# Allegro board XME0724CB_R21_4C.brd
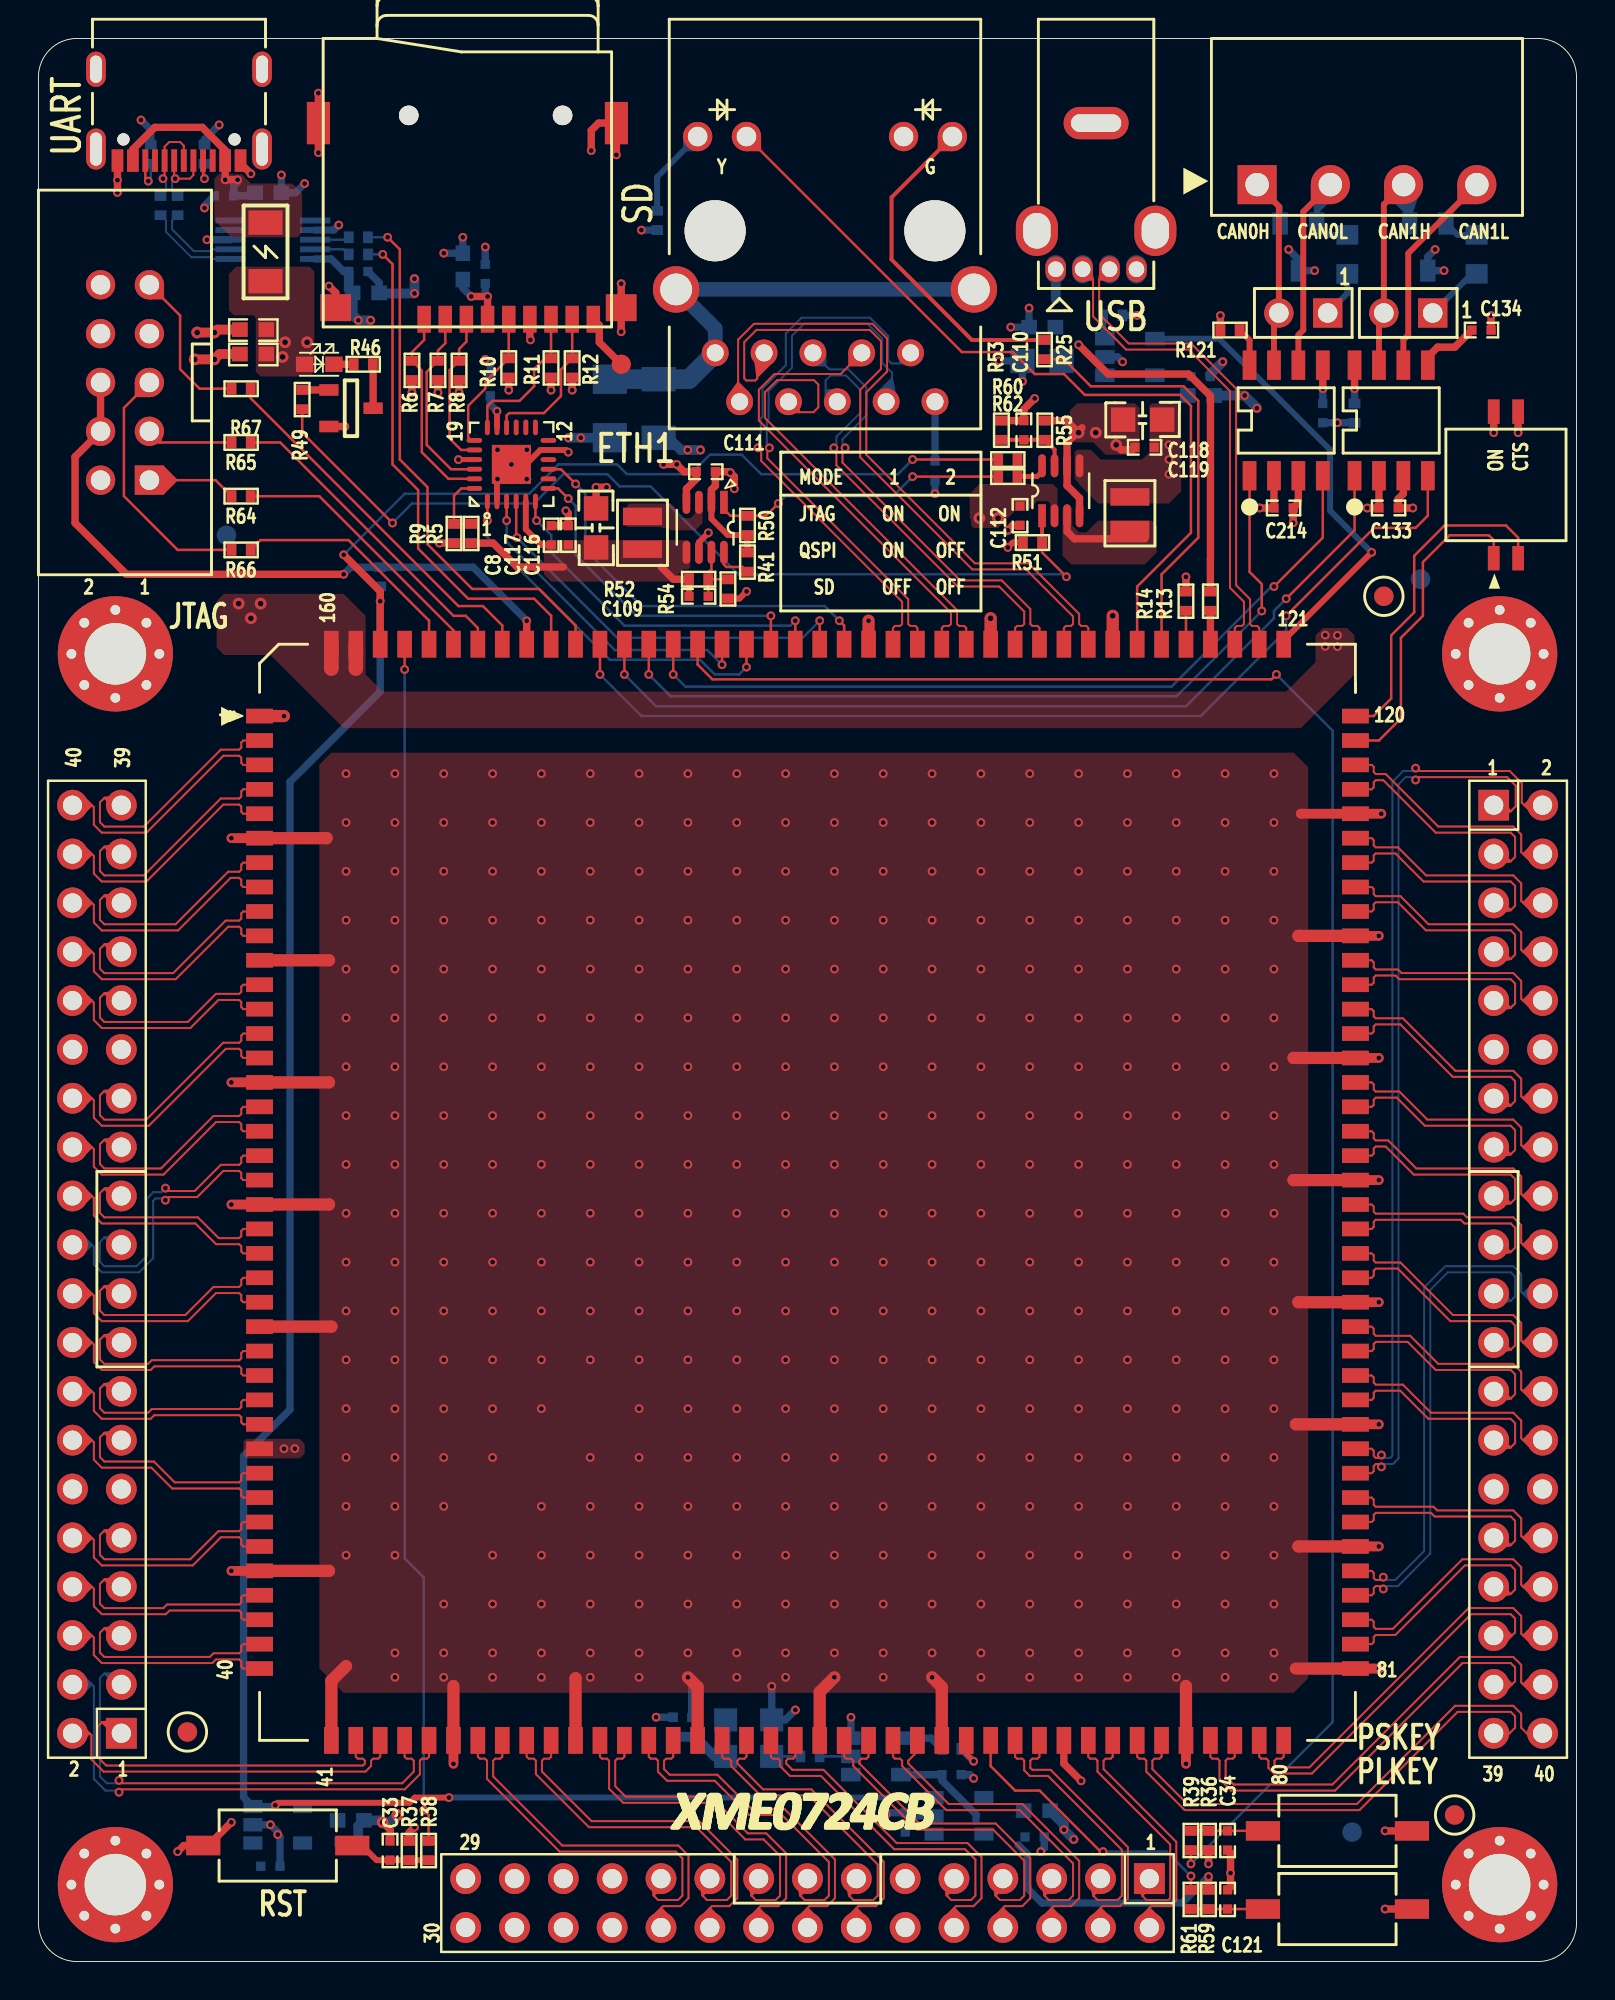
[diagram p0: board, top side]
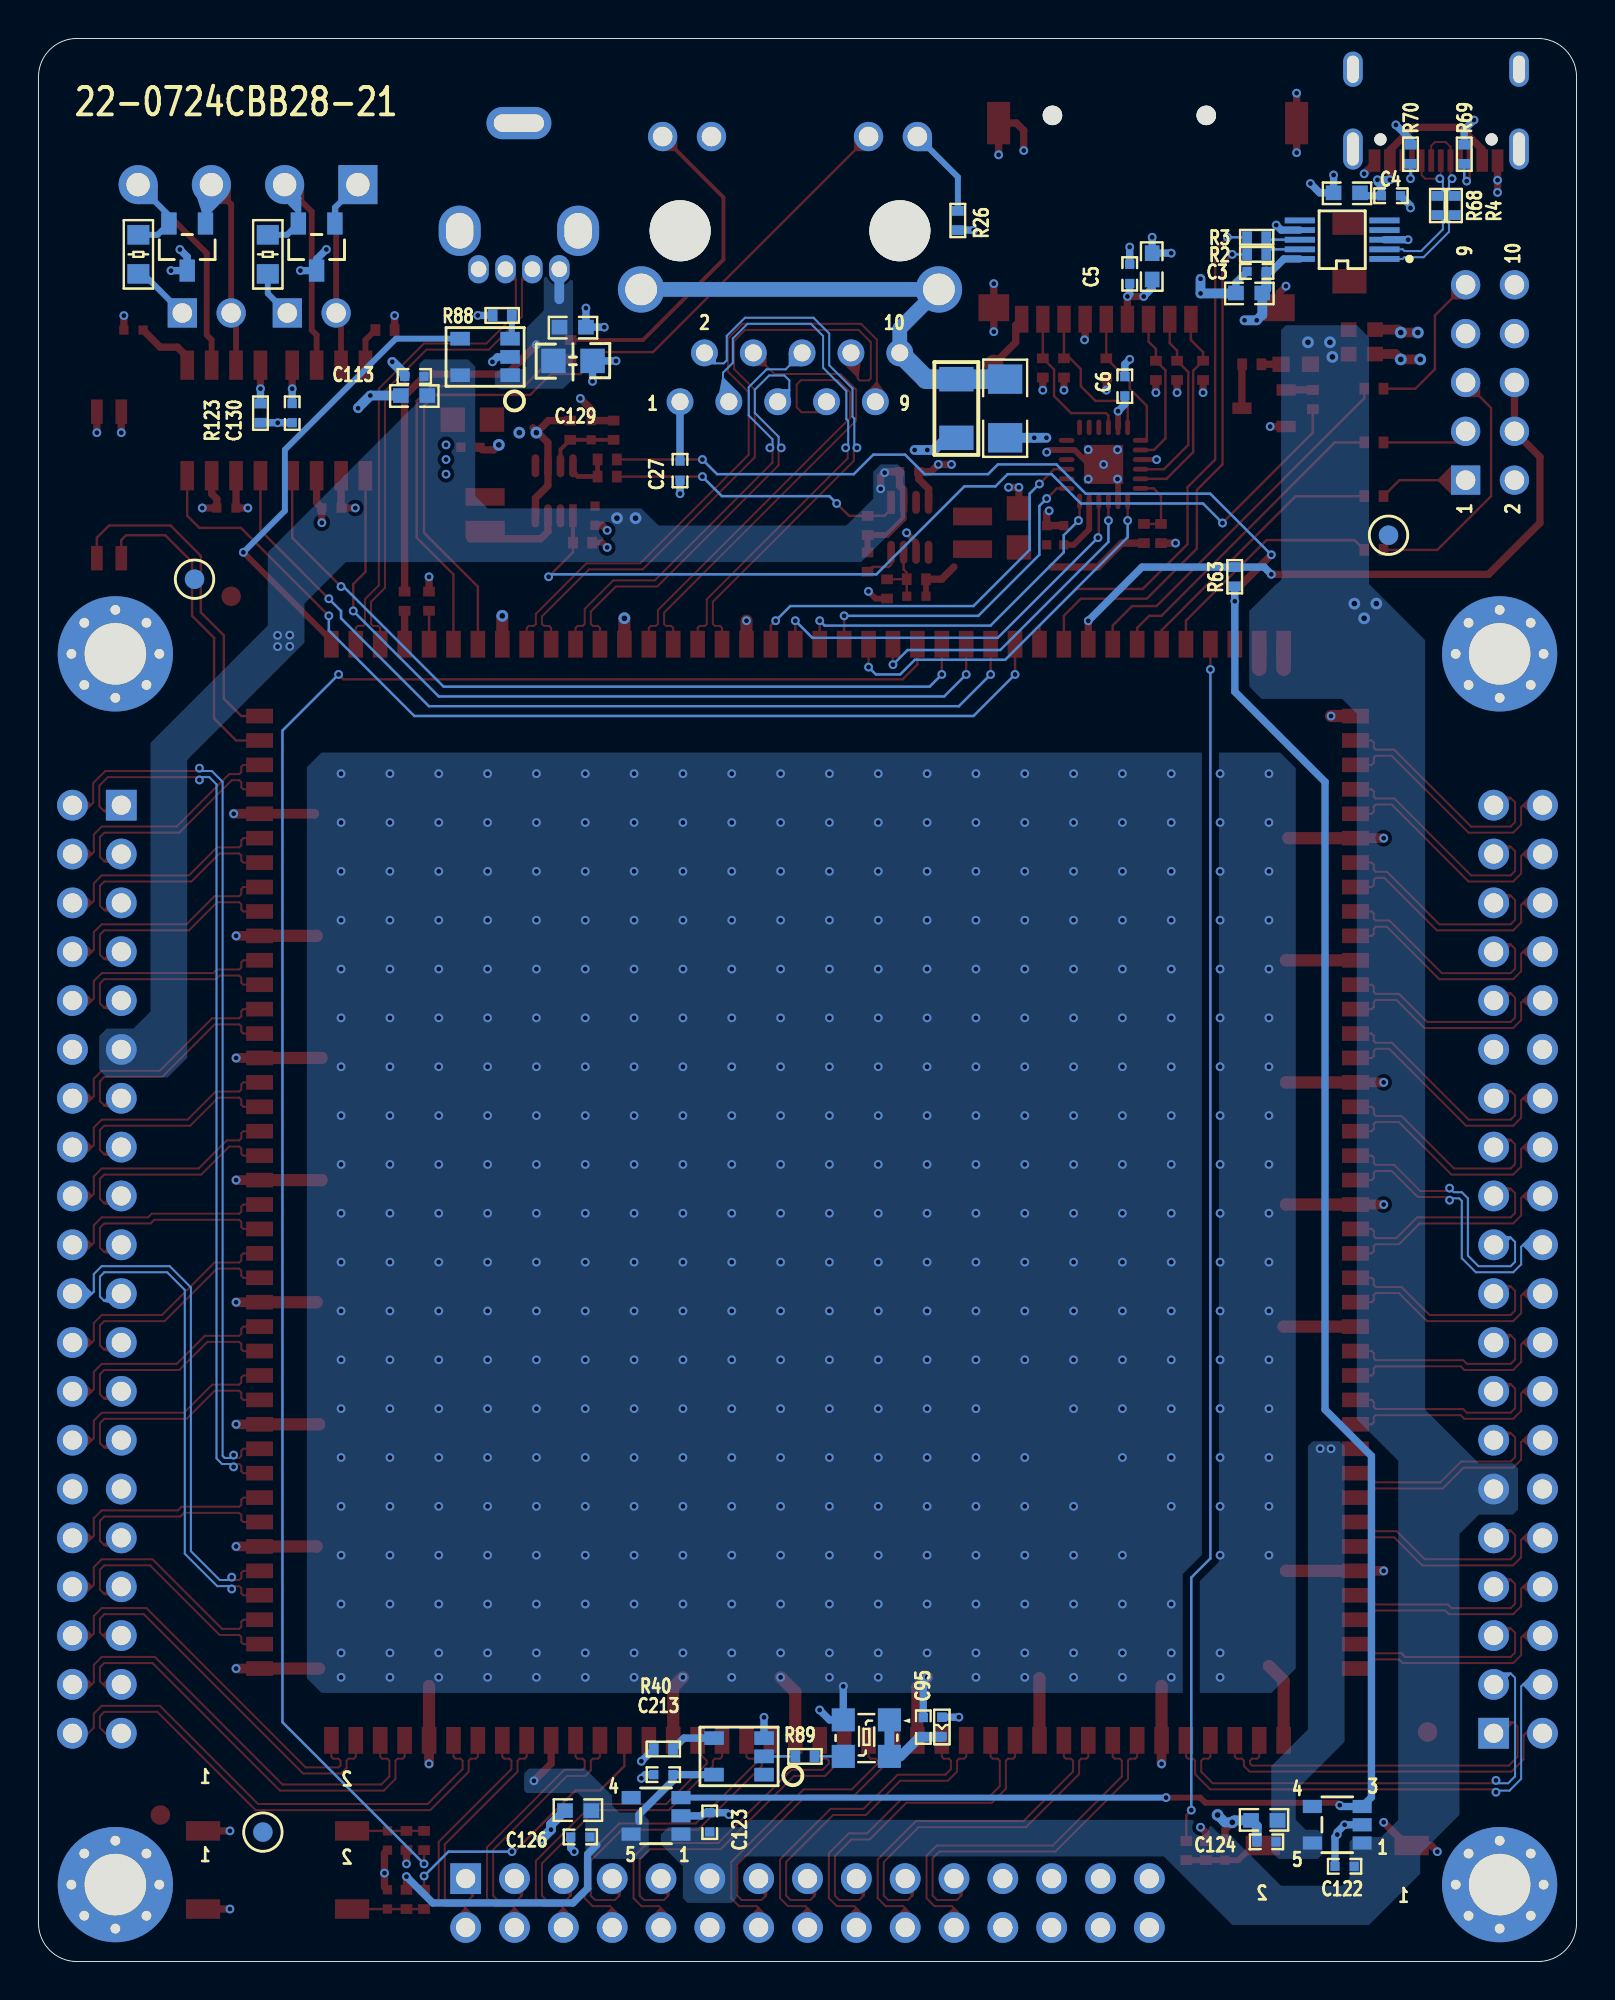
[diagram p1: board, bottom side, seen from below]

Outline 80 x 100 mm; copper layers: TOP, GND02, VCC03, BOTTOM. Coordinates in mm from the lower left corner of the outline.
Outline path: 0,98 arc(0.59,99.41) 2,100 78,100 arc(79.41,99.41) 80,98 80,2 arc(79.41,0.59) 78,0 2,0 arc(0.59,0.59) 0,2 0,98

## Design rules (mm)
net group DIFFPAIR0: nets N18472320 N18472322
net group USB2UART_D: nets USB2UART_DM USB2UART_DP
net group USB_OTG_: nets USB_OTG_N USB_OTG_P
net group ETH-DIFF: nets ETH_MDI0_N ETH_MDI0_P ETH_MDI1_N ETH_MDI1_P ETH_MDI2_N ETH_MDI2_P ETH_MDI3_N ETH_MDI3_P GPIO1_0N GPIO1_0P GPIO1_1N GPIO1_1P GPIO1_2N GPIO1_2P GPIO1_3N GPIO1_3P GPIO1_4N GPIO1_4P GPIO1_5N GPIO1_5P GPIO1_6N GPIO1_6P GPIO1_7N GPIO1_7P GPIO1_8N GPIO1_8P GPIO1_9N GPIO1_9P GPIO1_10N GPIO1_10P GPIO1_11N GPIO1_11P GPIO1_12N GPIO1_12P GPIO1_13N GPIO1_13P GPIO1_14N GPIO1_14P GPIO1_15N GPIO1_15P GPIO1_16N GPIO1_16P GPIO1_17N GPIO1_17P GPIO2_0N GPIO2_0P GPIO2_1N GPIO2_1P GPIO2_2N GPIO2_2P GPIO2_3N GPIO2_3P GPIO2_4N GPIO2_4P GPIO2_5N GPIO2_5P GPIO2_6N GPIO2_6P GPIO2_7N GPIO2_7P GPIO2_8N GPIO2_8P GPIO2_9N GPIO2_9P GPIO2_10N GPIO2_10P GPIO2_11N GPIO2_11P GPIO2_12N GPIO2_12P GPIO2_13N GPIO2_13P GPIO2_14N GPIO2_14P GPIO2_15N GPIO2_15P GPIO2_16N GPIO2_16P GPIO2_17N GPIO2_17P GPIO3_0N GPIO3_0P GPIO3_1N GPIO3_1P GPIO3_2N GPIO3_2P GPIO3_3N GPIO3_3P GPIO3_4N GPIO3_4P GPIO3_5N GPIO3_5P GPIO3_6N GPIO3_6P GPIO3_7N GPIO3_7P GPIO3_8N GPIO3_8P GPIO3_9N GPIO3_9P

## Placement (name value [footprint] x y rotation side)
B9  BLM15AX601SN1D  [0402L]  33.01 12.2 90 bottom
C1  10uF/10V  [0603C]  11.95 91.97 180 bottom
C2  10uF/6.3V  [0603C]  17.03 86.77 180 bottom
C3  0.1uF  [0402C]  16.64 87.88 0 bottom
C4  0.1uF  [0402C]  9.65 91.82 0 bottom
C5  0.1uF  [0402C]  23.24 87.76 270 bottom
C6  0.1uF  [0402C]  23.5 81.92 90 bottom
C7  10uF/10V  [0603C]  22.07 88.15 270 bottom
C8  0.1uF  [0402C]  26.67 74.17 90 top
C27  0.1uF  [0402C]  46.63 77.53 270 bottom
C28  100pF/1000V  [1206C]  29.72 80.76 270 bottom
C33  0.1uF  [0402C]  18.29 5.77 90 top
C34  0.1uF  [0402C]  61.85 6.29 270 top
C95  0.1uF  [0402C]  33.98 12.19 90 bottom
C103  10uF/10V  [0603C]  11.16 83.59 0 top
C104  10uF/10V  [0603C]  11.16 84.86 0 top
C108  10uF/6.3V  [0603C]  16.24 7.34 0 bottom
C109  15pF  [0402C]  34.34 70.99 0 top
C110  15pF  [0402C]  51.25 79.63 270 top
C111  0.1uF  [0402C]  34.71 77.47 0 top
C112  0.1uF  [0402C]  51.05 75.18 90 top
C113  0.1uF  [0402C]  60.45 82.42 180 bottom
C116  47uF/6.3V  [0805C]  29 74.55 0 top
C117  0.1uF  [0402C]  27.56 74.17 270 top
C118  47uF/6.3V  [0805C]  57.43 80.18 90 top
C119  0.1uF  [0402C]  57.53 78.74 0 top
C121  0.1uF  [0402C]  61.85 3.23 90 top
C122  0.1uF  [0402C]  12.06 4.95 180 bottom
C123  0.1uF  [0402C]  45.09 7.24 270 bottom
C124  0.1uF  [0402C]  16.13 6.22 0 bottom
C125  10uF/6.3V  [0603C]  51.93 7.85 0 bottom
C126  0.1uF  [0402C]  51.82 6.48 0 bottom
C127  10uF/10V  [0603C]  60.46 81.43 180 bottom
C128  10uF/10V  [0603C]  52.21 84.99 180 bottom
C129  47uF/10V  [0805C]  52.2 83.23 90 bottom
C130  0.1uF  [0402C]  66.8 80.52 270 bottom
C133  0.1uF  [0402C]  70.22 75.59 180 top
C134  0.1uF  [0402C]  75.06 84.84 0 top
C213  0.1uF  [0402C]  47.5 9.72 0 bottom
C214  0.1uF  [0402C]  64.76 75.59 180 top
D1  RED_LED  [0603LED]  14.61 83.06 0 top
D13  SM24CANA-02HTG  [SOT23-3]  65.53 89.15 0 bottom
D14  SM24CANA-02HTG  [SOT23-3]  72.26 89.15 0 bottom
F1  2A  [1206F]  11.81 88.9 270 top
J1  USB_TYPEC_16P  [TYPEC_16P]  7.31 98.4 180 top
J2  MicroSD  [TF-15-15B]  22.31 92.5 180 top
J3  USB_A_Type_H  [USB-H-2]  55.01 88 180 top
J5  HR911130A  [RJ45_HR911130A]  40.91 90 0 top
J6  JTAG  [HDR254F-2X5X850]  4.5 82.11 180 top
J12  CP381V-4P  [CON4-3P81-H]  69.1 92.4 90 top
JP1  CON40A  [SIP40-2P54-2X20]  3.04 36 90 top
JP2  CON40A  [SIP40-2P54-2X20]  76.96 36 270 top
JP3  CON30A  [SIP30-2P54-2X15]  40 3.04 180 top
K1  SW_2P  [SW2_3X6]  12.45 6.03 0 top
K2  SW_2P  [SW2_3X6]  67.56 6.79 180 top
K3  SW_2P  [SW2_3X6]  67.56 2.73 180 top
L3  1.5uH  [L2520]  31.42 74.29 270 top
L4  1.5uH  [L2520]  56.77 75.31 90 top
M1  M1  [HOLE32CIR60]  4 68 0 top
M2  M2  [HOLE32CIR60]  76 68 0 top
M3  M3  [HOLE32CIR60]  76 4 0 top
M4  M4  [HOLE32CIR60]  4 4 0 top
NOREF  -  []  42.26 9.72 90 top
NOREF#2  -  [unnamed#2]  73.66 7.62 0 top
NOREF#3  -  []  58.07 82.49 90 top
NOREF#4  -  [unnamed#2]  7.75 11.94 0 top
NOREF#5  -  []  55.47 84.39 0 top
NOREF#6  -  []  42.26 11.62 0 top
NOREF#7  -  [unnamed#2]  69.98 70.99 0 top
NOREF#8  -  []  55.47 82.49 90 top
NOREF#9  -  []  0 98 0 top
NOREF#10  -  []  44.86 9.72 90 top
NOREF#11  -  []  2 0 90 top
NOREF#12  -  []  42.26 9.72 90 top
NOREF#13  -  []  55.47 82.49 90 top
NOREF#14  -  [unnamed#2]  71.88 71.88 180 bottom
NOREF#15  -  [unnamed#2]  68.33 6.73 180 bottom
NOREF#16  -  [unnamed#2]  9.78 74.17 180 bottom
PH1  PH_2x1V_2.54mm  [SIP2-2P54]  67.06 85.72 180 top
PH2  PH_2x1V_2.54mm  [SIP2-2P54]  72.52 85.72 180 top
Q4  MMBT5551  [SOT23]  16.26 80.77 0 top
R2  33R  [0402R]  16.64 88.77 0 bottom
R3  33R  [0402R]  16.64 89.66 0 bottom
R4  27R  [0402R]  6.35 91.31 270 bottom
R5  4.7K(NC)  [0402R]  22.5 74.26 270 top
R6  4.7K(NC)  [0402R]  19.43 82.74 270 top
R7  4.7K(NC)  [0402R]  20.78 82.74 270 top
R8  4.7K  [0402R]  21.88 82.74 270 top
R9  4.7K  [0402R]  21.61 74.26 90 top
R10  4.7K(NC)  [0402R]  24.46 82.87 270 top
R11  4.7K(NC)  [0402R]  26.66 82.87 270 top
R12  4.7K(NC)  [0402R]  27.76 82.87 270 top
R13  10k  [0402R]  60.95 70.74 270 top
R14  10K(NC)  [0402R]  59.68 70.74 270 top
R25  330R  [0402R]  52.32 83.82 270 top
R26  330R  [0402R]  32.18 90.53 270 bottom
R35  1M  [1206R]  32.26 80.76 90 bottom
R36  10K  [0402R]  60.86 6.29 90 top
R37  10K  [0402R]  19.28 5.77 270 top
R38  100R  [0402R]  20.29 5.77 270 top
R39  100R  [0402R]  59.94 6.29 90 top
R40  33R  [0402R]  47.5 11.05 0 bottom
R41  4.7K  [0402R]  36.88 72.77 270 top
R46  2K  [0402R]  16.89 83.06 0 top
R49  10K  [0402R]  13.72 81.22 90 top
R50  4.7K  [0402R]  36.88 74.68 270 top
R51  4.7K  [0402R]  51.7 73.79 180 top
R52  20K 1%  [0402R]  34.34 71.88 180 top
R53  45.3K 1%  [0402R]  50.09 79.63 90 top
R54  10K 1%  [0402R]  35.86 71.37 90 top
R55  10K 1%  [0402R]  52.34 79.63 270 top
R59  10K  [0402R]  60.86 3.23 270 top
R60  0R  [0402R]  50.42 78.11 0 top
R61  100R  [0402R]  59.94 3.23 270 top
R62  0R(NC)  [0402R]  50.42 77.22 0 top
R63  4.7K  [0402R]  17.78 72.01 270 bottom
R64  33R  [0402R]  10.54 76.2 0 top
R65  33R  [0402R]  10.54 78.99 0 top
R66  33R  [0402R]  10.54 73.41 0 top
R67  33R  [0402R]  10.54 81.79 0 top
R68  27R  [0402R]  7.24 91.31 270 bottom
R69  5.1K  [0402R]  5.84 93.98 270 bottom
R70  5.1K  [0402R]  8.64 93.98 270 bottom
R88  10K  [0402R]  55.88 85.6 180 bottom
R89  33R  [0402R]  40.13 10.67 0 bottom
R121  10k  [0402R]  61.98 84.84 180 top
R123  10k  [0402R]  68.45 80.52 270 bottom
R143  120R  [0805R]  68.07 88.77 90 bottom
R144  120R  [0805R]  74.8 88.77 90 bottom
SW1  SW DIP-2  [218-2LPSTR]  76.33 76.78 0 top
TP1  TP_R  [TP4]  30.31 83.06 180 top
U1  XME0724R  [XME0724S]  40 40 270 top
U2  CH340E  [MSOP10-0P5-3X3]  12.19 89.53 0 bottom
U4  TXS02612RTWR  [QFN24-0P5-4X4]  24.6 77.85 90 top
U6  TPS2051BDBV  [SOT23-5]  56.77 83.44 90 bottom
U18  MP2143DJ  [SOT23-8]  34.68 74.58 180 top
U19  MP2143DJ  [SOT23-8]  53.17 76.48 0 top
U23  SPX3819M5-L-3-3  [SOT-23]  12.45 7.11 90 bottom
U24  SPX3819M5-L-3-3  [SOT-23]  47.88 7.58 90 bottom
U29  SN65HVD230  [SOP8-1P27-4X5]  64.9 80.14 90 top
U31  SN65HVD230  [SOP8-1P27-4X5]  70.36 80.14 90 top
U50  SN74AUP1G34DBVR  [SOT23-5]  43.56 10.67 90 bottom
Y3  50M_OSC  [XTAL3225M]  36.94 11.62 0 bottom

## Library data of the parts
B9 = BEAD
C1 C4 C5 C7 C27 C103 C104 C109-C112 C116-C119 C122 C123 = C
C2 C3 C6 C8 C28 C33 C34 C95 C108 C113 C121 C124-C130 C133 C134 C213 C214 = CAP
D1 = LED
D13 D14 = SM24CANA-02HTG
F1 = FUSE
J1 = USB_TYPEC_16P: User Part Number: *; Tolerance: *
J2 = MicroSD_1
J3 = USB_A_Type_H
J5 = RJ45_HR911130A: Tolerance: *; User Part Number: *
J6 = CON10A: Tolerance: *; User Part Number: *
J12 = CP381V-4P: Tolerance: *; User Part Number: *
JP1 JP2 = CON40A
JP3 = CON30A
K1-K3 = SW_2P
L3 L4 = L: User Part Number: *; Tolerance: *
M1-M4 TP1 = TP_R
PH1 PH2 = 1653_JH2X1V_0: Tolerance: TOL
Q4 = NPN2
R2 R3 = RES
R4 R6-R8 R10-R12 R25 R26 R35-R39 R41 R46 R49-R55 R59-R63 R68-R70 R88 = R
R5 R9 R13 R14 R40 R64-R67 R89 R121 R123 = RESISTOR
R143 R144 = 10_R_0
SW1 = SW DIP-2_0
U1 = XME0724S
U2 = CH340E: User Part Number: *; Tolerance: *
U4 = LevelShift_TXS02612_SDIO
U6 = Switch_TPS2051BDBV
U18 U19 = MP2143
U23 U24 = SPX3819M5-2-5
U29 U31 = SN65HVD230: User Part Number: *; Tolerance: *
U50 = SN74LVC1G04
Y3 = OSC

## Footprints (pads in the part's own frame, mm; a bottom-side part is the same pattern mirrored in y, then rotated)
218-2LPSTR
  rect 0.61x1.27 smd: 1(-0.635,-3.81) 2(0.635,-3.81) 3(0.635,3.81) 4(-0.635,3.81)
0402C
  rect 0.483x0.483 smd: 1(-0.5,0) 2(0.5,0)
0402L
  rect 0.5x0.5 smd: 1(-0.508,0) 2(0.508,0)
0402R
  rect 0.508x0.61 smd: 1(-0.5,0) 2(0.5,0)
0603C
  rect 0.813x0.762 smd: 1(-0.686,0) 2(0.686,0)
0603LED
  rect 0.9x0.8 smd: A(-0.762,0) K(0.762,0)
0805C
  rect 1.27x1.27 smd: 1(0,1.016) 2(0,-1.016)
0805R
  rect 1.016x1.143 smd: 1(-1.016,0) 2(1.016,0)
1206C
  rect 1.524x1.778 smd: 1(-1.524,0) 2(1.524,0)
1206F
  rect 1.27x1.778 smd: 1(-1.524,0) 2(1.524,0)
1206R
  rect 1.27x1.778 smd: 1(-1.524,0) 2(1.524,0)
CON4-3P81-H
  rect 2.032x2.032 hole 1.219: 1(0,5.715)
  round 2.032 hole 1.219: 2(0,1.905) 3(0,-1.905) 4(0,-5.715)
HDR254F-2X5X850
  rect 1.524x1.524 hole 1.016: 1(-1.27,5.08)
  round 1.524 hole 1.016: 2(1.27,5.08) 3(-1.27,2.54) 4(1.27,2.54) 5(-1.27,0) 6(1.27,0) 7(-1.27,-2.54) 8(1.27,-2.54) 9(-1.27,-5.08) 10(1.27,-5.08)
HOLE32CIR60
  round 1.016 hole 0.508: (-2.286,0) (-1.617,1.617) (-1.617,-1.617) (0,2.286) (0,-2.286) (1.617,1.617) (1.617,-1.617) (2.286,0)
  round 5.994 hole 3.2: 1(0,0)
L2520
  rect 0.914x2.032 smd: 1(-0.85,0) 2(0.85,0)
MSOP10-0P5-3X3
  rect 1.575x0.305 smd: 1(-2.2,1) 2(-2.2,0.5) 3(-2.2,0) 4(-2.2,-0.5) 5(-2.2,-1) 6(2.2,-1) 7(2.2,-0.5) 8(2.2,0) 9(2.2,0.5) 10(2.2,1)
QFN24-0P5-4X4
  oval 0.813x0.254 smd: 1(-1.925,1.25) 2(-1.925,0.75) 3(-1.925,0.25) 4(-1.925,-0.25) 5(-1.925,-0.75) 6(-1.925,-1.25) 13(1.925,-1.25) 14(1.925,-0.75) 15(1.925,-0.25) 16(1.925,0.25) 17(1.925,0.75) 18(1.925,1.25)
  oval 0.254x0.813 smd: 7(-1.25,-1.925) 8(-0.75,-1.925) 9(-0.25,-1.925) 10(0.25,-1.925) 11(0.75,-1.925) 12(1.25,-1.925) 19(1.25,1.925) 20(0.75,1.925) 21(0.25,1.925) 22(-0.25,1.925) 23(-0.75,1.925) 24(-1.25,1.925)
  rect 2.032x2.032 smd: 25(0,0)
RJ45_HR911130A
  round 3.175 hole 3.175 unplated: (-5.715,0) (5.715,0)
  round 1.397 hole 0.889: 1(5.72,-8.89) 2(4.45,-6.35) 3(3.18,-8.89) 4(1.91,-6.35) 5(0.64,-8.89) 6(-0.63,-6.35) 7(-1.9,-8.89) 8(-3.17,-6.35) 9(-4.44,-8.89) 10(-5.71,-6.35)
  round 1.524 hole 1.016: 11(6.625,4.9) 12(4.085,4.9) 13(-4.085,4.9) 14(-6.625,4.9)
  round 2.413 hole 1.651: 15(7.745,-3.05) 16(-7.745,-3.05)
SIP2-2P54
  rect 1.524x1.524 hole 1.016: 1(0,0)
  round 1.524 hole 1.016: 2(2.54,0)
SIP30-2P54-2X15
  rect 1.6x1.6 hole 1: 1(-17.78,-1.27)
  round 1.6 hole 1: 2(-17.78,1.27) 3(-15.24,-1.27) 4(-15.24,1.27) 5(-12.7,-1.27) 6(-12.7,1.27) 7(-10.16,-1.27) 8(-10.16,1.27) 9(-7.62,-1.27) 10(-7.62,1.27) 11(-5.08,-1.27) 12(-5.08,1.27) 13(-2.54,-1.27) 14(-2.54,1.27) 15(0,-1.27) 16(0,1.27) 17(2.54,-1.27) 18(2.54,1.27) 19(5.08,-1.27) 20(5.08,1.27) 21(7.62,-1.27) 22(7.62,1.27) 23(10.16,-1.27) 24(10.16,1.27) 25(12.7,-1.27) 26(12.7,1.27) 27(15.24,-1.27) 28(15.24,1.27) 29(17.78,-1.27) 30(17.78,1.27)
SIP40-2P54-2X20
  rect 1.6x1.6 hole 1: 1(-24.13,-1.27)
  round 1.6 hole 1: 2(-24.13,1.27) 3(-21.59,-1.27) 4(-21.59,1.27) 5(-19.05,-1.27) 6(-19.05,1.27) 7(-16.51,-1.27) 8(-16.51,1.27) 9(-13.97,-1.27) 10(-13.97,1.27) 11(-11.43,-1.27) 12(-11.43,1.27) 13(-8.89,-1.27) 14(-8.89,1.27) 15(-6.35,-1.27) 16(-6.35,1.27) 17(-3.81,-1.27) 18(-3.81,1.27) 19(-1.27,-1.27) 20(-1.27,1.27) 21(1.27,-1.27) 22(1.27,1.27) 23(3.81,-1.27) 24(3.81,1.27) 25(6.35,-1.27) 26(6.35,1.27) 27(8.89,-1.27) 28(8.89,1.27) 29(11.43,-1.27) 30(11.43,1.27) 31(13.97,-1.27) 32(13.97,1.27) 33(16.51,-1.27) 34(16.51,1.27) 35(19.05,-1.27) 36(19.05,1.27) 37(21.59,-1.27) 38(21.59,1.27) 39(24.13,-1.27) 40(24.13,1.27)
SOP8-1P27-4X5
  rect 1.524x0.711 smd: 1(-2.875,1.905) 2(-2.875,0.635) 3(-2.875,-0.635) 4(-2.875,-1.905) 5(2.875,-1.905) 6(2.875,-0.635) 7(2.875,0.635) 8(2.875,1.905)
SOT23
  rect 1x0.6 smd: 1(-1.15,0.95) 2(-1.15,-0.95) 3(1.15,0)
SOT23-3
  rect 0.8x1.15 smd: 1(-0.95,-1.225) 2(0.95,-1.225) 3(0,1.225)
SOT23-5
  rect 0.711x1.016 smd: 1(-0.95,-1.3) 2(0,-1.3) 3(0.95,-1.3) 4(0.95,1.3) 5(-0.95,1.3)
SOT23-8
  rect 0.4x1.2 smd: 1(-0.975,-1.3)
  oval 0.4x1.2 smd: 2(-0.325,-1.3) 3(0.325,-1.3) 4(0.975,-1.3) 5(0.975,1.3) 6(0.325,1.3) 7(-0.325,1.3) 8(-0.975,1.3)
SOT-23
  rect 0.686x0.991 smd: 1(-0.95,-1.295) 2(0,-1.295) 3(0.95,-1.295) 4(0.95,1.295) 5(-0.95,1.295)
SW2_3X6
  rect 1.778x1.016 smd: 1(-3.875,0) 2(3.875,0)
TF-15-15B
  round 1.016 hole 1.016 unplated: (-4.95,-3.5) (3.05,-3.5)
  rect 0.7x1.4 smd: 1(2.25,7.1) 2(1.15,7.1) 3(0.05,7.1) 4(-1.05,7.1) 5(-2.15,7.1) 6(-3.25,7.1) 7(-4.35,7.1) 8(-5.45,7.1) 9(-6.55,7.1)
  rect 1.6x1.4 smd: 10(-8,6.5) 11(6.85,6.5)
  rect 1.2x2.2 smd: 12(-7.75,-3.1) 13(7.75,-3.1)
TP4
  round 1 smd: 1(0,0)
TYPEC_16P
  round 0.635 hole 0.635 unplated: (-2.89,3.65) (2.89,3.65)
  rect 0.61x1.168 smd: A1B12(-3.2,4.75) A4B9(-2.4,4.75) B1A12(3.2,4.75) B4A9(2.4,4.75)
  rect 0.305x1.168 smd: A5(-1.25,4.75) A6(-0.25,4.75) A7(0.25,4.75) A8(-1.75,4.75) B5(1.75,4.75) B6(0.75,4.75) B7(-0.75,4.75) B8(1.25,4.75)
  oval 1.016x2.134 hole 0.61x1.727: G1(-4.32,4.15) G2(4.32,4.15)
  oval 1.016x1.829 hole 0.61x1.422: G3(-4.32,0) G4(4.32,0)
unnamed#2
  round 1.016 smd: 1(0,0)
USB-H-2
  oval 1.067x1.321 hole 0.813: 1(2.1,0) 2(0.7,0) 3(-0.7,0) 4(-2.1,0)
  oval 2.184x2.616 hole 1.422x1.854: BO1(-3.08,-2) BO2(3.08,-2)
  oval 3.378x1.676 hole 2.616x0.914: BO3(0,-7.6)
XME0724S
  rect 0.762x1.397 smd: 1(-24.765,-28.5) 2(-23.495,-28.5) 3(-22.225,-28.5) 4(-20.955,-28.5) 5(-19.685,-28.5) 6(-18.415,-28.5) 7(-17.145,-28.5) 8(-15.875,-28.5) 9(-14.605,-28.5) 10(-13.335,-28.5) 11(-12.065,-28.5) 12(-10.795,-28.5) 13(-9.525,-28.5) 14(-8.255,-28.5) 15(-6.985,-28.5) 16(-5.715,-28.5) 17(-4.445,-28.5) 18(-3.175,-28.5) 19(-1.905,-28.5) 20(-0.635,-28.5) 21(0.635,-28.5) 22(1.905,-28.5) 23(3.175,-28.5) 24(4.445,-28.5) 25(5.715,-28.5) 26(6.985,-28.5) 27(8.255,-28.5) 28(9.525,-28.5) 29(10.795,-28.5) 30(12.065,-28.5) 31(13.335,-28.5) 32(14.605,-28.5) 33(15.875,-28.5) 34(17.145,-28.5) 35(18.415,-28.5) 36(19.685,-28.5) 37(20.955,-28.5) 38(22.225,-28.5) 39(23.495,-28.5) 40(24.765,-28.5) 81(24.765,28.5) 82(23.495,28.5) 83(22.225,28.5) 84(20.955,28.5) 85(19.685,28.5) 86(18.415,28.5) 87(17.145,28.5) 88(15.875,28.5) 89(14.605,28.5) 90(13.335,28.5) 91(12.065,28.5) 92(10.795,28.5) 93(9.525,28.5) 94(8.255,28.5) 95(6.985,28.5) 96(5.715,28.5) 97(4.445,28.5) 98(3.175,28.5) 99(1.905,28.5) 100(0.635,28.5) 101(-0.635,28.5) 102(-1.905,28.5) 103(-3.175,28.5) 104(-4.445,28.5) 105(-5.715,28.5) 106(-6.985,28.5) 107(-8.255,28.5) 108(-9.525,28.5) 109(-10.795,28.5) 110(-12.065,28.5) 111(-13.335,28.5) 112(-14.605,28.5) 113(-15.875,28.5) 114(-17.145,28.5) 115(-18.415,28.5) 116(-19.685,28.5) 117(-20.955,28.5) 118(-22.225,28.5) 119(-23.495,28.5) 120(-24.765,28.5)
  rect 1.397x0.762 smd: 41(28.5,-24.765) 42(28.5,-23.495) 43(28.5,-22.225) 44(28.5,-20.955) 45(28.5,-19.685) 46(28.5,-18.415) 47(28.5,-17.145) 48(28.5,-15.875) 49(28.5,-14.605) 50(28.5,-13.335) 51(28.5,-12.065) 52(28.5,-10.795) 53(28.5,-9.525) 54(28.5,-8.255) 55(28.5,-6.985) 56(28.5,-5.715) 57(28.5,-4.445) 58(28.5,-3.175) 59(28.5,-1.905) 60(28.5,-0.635) 61(28.5,0.635) 62(28.5,1.905) 63(28.5,3.175) 64(28.5,4.445) 65(28.5,5.715) 66(28.5,6.985) 67(28.5,8.255) 68(28.5,9.525) 69(28.5,10.795) 70(28.5,12.065) 71(28.5,13.335) 72(28.5,14.605) 73(28.5,15.875) 74(28.5,17.145) 75(28.5,18.415) 76(28.5,19.685) 77(28.5,20.955) 78(28.5,22.225) 79(28.5,23.495) 80(28.5,24.765) 121(-28.5,24.765) 122(-28.5,23.495) 123(-28.5,22.225) 124(-28.5,20.955) 125(-28.5,19.685) 126(-28.5,18.415) 127(-28.5,17.145) 128(-28.5,15.875) 129(-28.5,14.605) 130(-28.5,13.335) 131(-28.5,12.065) 132(-28.5,10.795) 133(-28.5,9.525) 134(-28.5,8.255) 135(-28.5,6.985) 136(-28.5,5.715) 137(-28.5,4.445) 138(-28.5,3.175) 139(-28.5,1.905) 140(-28.5,0.635) 141(-28.5,-0.635) 142(-28.5,-1.905) 143(-28.5,-3.175) 144(-28.5,-4.445) 145(-28.5,-5.715) 146(-28.5,-6.985) 147(-28.5,-8.255) 148(-28.5,-9.525) 149(-28.5,-10.795) 150(-28.5,-12.065) 151(-28.5,-13.335) 152(-28.5,-14.605) 153(-28.5,-15.875) 154(-28.5,-17.145) 155(-28.5,-18.415) 156(-28.5,-19.685) 157(-28.5,-20.955) 158(-28.5,-22.225) 159(-28.5,-23.495) 160(-28.5,-24.765)
XTAL3225M
  rect 1.2x1.2 smd: 1(-1.2,-0.95) 2(1.2,-0.95) 3(1.2,0.95) 4(-1.2,0.95)

## Nets
GND: C1.1 C2.1 C3.2 C4.1 C5.1 C6.2 C7.1 C8.2 C27.2 C28.2 C33.2 C34.2 C95.2 C103.1 C104.1 C108.2 C111.1 C112.1 C113.1 C116.1 C117.1 C118.1 C119.1 C121.2 C122.1 C123.1 C124.2 C125.2 C126.2 C127.1 C128.2 C129.2 C130.2 C133.2 C134.2 C213.2 C214.2 D13.3 D14.3 J1.A1B12(GND#A1B12) J1.B1A12(GND#B1A12) J1.G1(S1) J1.G2(S2) J1.G3(S3) J1.G4(S4) J2.6(VSS#6) J2.10(VSS#10) J2.11(VSS#11) J2.12(VSS#12) J2.13(VSS#13) J3.4(GND) J3.BO1(S1) J3.BO2(S2) J3.BO3(S3) J5.12(LED_G-) J6.2 J6.10 JP1.12 JP1.30 JP2.12 JP2.30 JP3.12 JP3.30 K1.1 K2.1 K3.1 M1.1 M2.1 M3.1 M4.1 Q4.2(E) R9.1 R14.1 R35.1 R54.1 R55.1 R69.1 R70.1 R121.2 R123.2 SW1.3(B2) SW1.4(B1) U1.1(GND#1) U1.6(GND#6) U1.11(GND#11) U1.16(GND#16) U1.21(GND#21) U1.26(GND#26) U1.36(GND#36) U1.41(GND#41) U1.46(GND#46) U1.51(GND#51) U1.56(GND#56) U1.61(GND#61) U1.66(GND#66) U1.76(GND#76) U1.81(GND#81) U1.86(GND#86) U1.91(GND#91) U1.96(GND#96) U1.101(GND#101) U1.106(GND#106) U1.111(GND#111) U1.116(GND#116) U1.128(GND#128) U1.133(GND#133) U1.138(GND#138) U2.3(GND) U4.2(GND#2) U4.11(GND#11) U4.25(PGND) U6.2(GND) U18.4(GND#4) U18.6(GND#6) U19.4(GND#4) U19.6(GND#6) U23.2(GND) U24.2(GND) U29.2(GND) U31.2(GND) U50.3(GND) Y3.2(GND)
VCC_1V8: C8.1 C109.1 C116.2 C117.2 L3.2 R5.2 R52.2 U4.5(VCCA) U18.5(VOUT)
VCC_3V3: B9.2 C2.2 C3.1 C5.2 C6.1 C7.2 C110.1 C118.2 C119.2 C133.1 C214.1 J2.4(VCC) JP1.29 JP2.29 JP3.29 L4.2 R6.2 R7.2 R8.2 R10.2 R11.2 R12.2 R26.2 R36.1 R37.1 R51.2 R53.2 R88.1 U2.7(VCC) U2.10(V3) U4.17(VCCB1) U4.21(VCCB0) U19.5(VOUT) U29.3(VCC) U31.3(VCC)
VCC_5V: C103.2 C104.2 C111.2 C112.2 C113.2 C122.2 C123.2 C127.2 D1.A F1.2 JP1.11 JP2.11 JP3.11 R41.1 R50.2 U1.159(VINMOD#159) U1.160(VINMOD#160) U6.5(IN) U18.2(VIN) U19.2(VIN) U23.1(VIN) U24.1(VIN)
VCC_USB2UART_5V: C1.2 C4.2 F1.1 J1.A4B9(VBUS#A4B9) J1.B4A9(VBUS#B4A9)
VCC_USB5V: C128.1 C129.1 J3.1(VDD) R13.1 U6.1(OUT)
VCCIO34: C108.1 C124.1 U1.31(VCCIO34) U23.5(VOUT)
VCCIO35: C125.1 C126.1 C213.1 R59.1 U1.71(VCCIO35) U24.5(VOUT) U50.5(VCC)
CAN0_RX: U1.146(MIO10) U29.4(R)
CAN0_TX: U1.147(MIO11) U29.1(D)
CAN0H: D13.1 J12.1(A) PH1.2 U29.7(CANH)
CAN0L: D13.2 J12.2(B) R143.2 U29.6(CANL)
CAN1_RX: U1.149(MIO13) U31.4(R)
CAN1_TX: U1.148(MIO12) U31.1(D)
CAN1H: D14.1 J12.3(C) PH2.2 U31.7(CANH)
CAN1L: D14.2 J12.4(D) R144.2 U31.6(CANL)
CON_SD_CLK: J2.5(CLK) R10.1 U4.19(CLKB0)
CON_SD_CMD: J2.3(CMD) R8.1 U4.20(CMDB0)
CON_SD_DATA0: J2.7(DAT0) R11.1 U4.18(DATA0B0)
CON_SD_DATA1: J2.8(DAT1) R12.1 U4.16(DATA1B0)
CON_SD_DATA2: J2.1(DAT2) R6.1 U4.23(DATA2B0)
CON_SD_DATA3: J2.2(DAT3) R7.1 U4.22(DATA3B0)
ETH_MDI0_N: J5.3(MDI0-) U1.136(ETH_MDI0_N)
ETH_MDI0_P: J5.2(MDI0+) U1.137(ETH_MDI0_P)
ETH_MDI1_N: J5.7(MDI1-) U1.134(ETH_MDI1_N)
ETH_MDI1_P: J5.4(MDI1+) U1.135(ETH_MDI1_P)
ETH_MDI2_N: J5.6(MDI2-) U1.131(ETH_MDI2_N)
ETH_MDI2_P: J5.5(MDI2+) U1.132(ETH_MDI2_P)
ETH_MDI3_N: J5.9(MDI3-) U1.129(ETH_MDI3_N)
ETH_MDI3_P: J5.8(MDI3+) U1.130(ETH_MDI3_P)
FPGA_GCLK1: R40.2 U1.67(B35_L12_P_MRCC)
FPGA_TCK: R64.2 U1.155(FPGA_TCK)
FPGA_TDI: R67.2 U1.153(FPGA_TDI)
FPGA_TDO: R65.2 U1.154(FPGA_TDO)
FPGA_TMS: R66.2 U1.156(FPGA_TMS)
GPIO1_0N: JP1.2 U1.43(B34_L12_N_MRCC)
GPIO1_0P: JP1.1 U1.42(B34_L12_P_MRCC)
GPIO1_1N: JP1.4 U1.45(B34_L15_N)
GPIO1_1P: JP1.3 U1.44(B34_L15_P)
GPIO1_2N: JP1.6 U1.40(B34_L16_N)
GPIO1_2P: JP1.5 U1.39(B34_L16_P)
GPIO1_3N: JP1.8 U1.38(B34_L22_N)
GPIO1_3P: JP1.7 U1.37(B34_L22_P)
GPIO1_4N: JP1.10 U1.35(B34_L17_N)
GPIO1_4P: JP1.9 U1.34(B34_L17_P)
GPIO1_5N: JP1.14 U1.33(B34_L21_N)
GPIO1_5P: JP1.13 U1.32(B34_L21_P)
GPIO1_6N: JP1.16 U1.30(B34_L7_N)
GPIO1_6P: JP1.15 U1.29(B34_L7_P)
GPIO1_7N: JP1.18 U1.28(B34_L9_N)
GPIO1_7P: JP1.17 U1.27(B34_L9_P)
GPIO1_8N: JP1.20 U1.25(B34_L18_N)
GPIO1_8P: JP1.19 U1.24(B34_L18_P)
GPIO1_9N: JP1.22 U1.20(B34_L11_N_SRCC)
GPIO1_9P: JP1.21 U1.19(B34_L11_P_SRCC)
GPIO1_10N: JP1.24 U1.23(B34_L10_N)
GPIO1_10P: JP1.23 U1.22(B34_L10_P)
GPIO1_11N: JP1.26 U1.18(B34_L8_N)
GPIO1_11P: JP1.25 U1.17(B34_L8_P)
GPIO1_12N: JP1.28 U1.15(B34_L5_N)
GPIO1_12P: JP1.27 U1.14(B34_L5_P)
GPIO1_13N: JP1.32 U1.13(B34_L6_N)
GPIO1_13P: JP1.31 U1.12(B34_L6_P)
GPIO1_14N: JP1.34 U1.10(B34_L4_N)
GPIO1_14P: JP1.33 U1.9(B34_L4_P)
GPIO1_15N: JP1.36 U1.8(B34_L3_N)
GPIO1_15P: JP1.35 U1.7(B34_L3_P)
GPIO1_16N: JP1.38 U1.5(B34_L2_N)
GPIO1_16P: JP1.37 U1.4(B34_L2_P)
GPIO1_17N: JP1.40 U1.3(B34_L1_N)
GPIO1_17P: JP1.39 U1.2(B34_L1_P)
GPIO2_0N: JP2.2 U1.90(B35_L14_N_SRCC)
GPIO2_0P: JP2.1 U1.89(B35_L14_P_SRCC)
GPIO2_1N: JP2.4 U1.118(B35_L3_N)
GPIO2_1P: JP2.3 U1.117(B35_L3_P)
GPIO2_2N: JP2.6 U1.115(B35_L5_N)
GPIO2_2P: JP2.5 U1.114(B35_L5_P)
GPIO2_3N: JP2.8 U1.113(B35_L1_N)
GPIO2_3P: JP2.7 U1.112(B35_L1_P)
GPIO2_4N: JP2.10 U1.110(B35_L20_N)
GPIO2_4P: JP2.9 U1.109(B35_L20_P)
GPIO2_5N: JP2.14 U1.108(B35_L2_N)
GPIO2_5P: JP2.13 U1.107(B35_L2_P)
GPIO2_6N: JP2.16 U1.105(B35_L19_N)
GPIO2_6P: JP2.15 U1.104(B35_L19_P)
GPIO2_7N: JP2.18 U1.103(B35_L6_N)
GPIO2_7P: JP2.17 U1.102(B35_L6_P)
GPIO2_8N: JP2.20 U1.100(B35_L4_N)
GPIO2_8P: JP2.19 U1.99(B35_L4_P)
GPIO2_9N: JP2.22 U1.85(B35_L11_N_SRCC)
GPIO2_9P: JP2.21 U1.84(B35_L11_P_SRCC)
GPIO2_10N: JP2.24 U1.98(B35_L15_N)
GPIO2_10P: JP2.23 U1.97(B35_L15_P)
GPIO2_11N: JP2.26 U1.95(B35_L16_N)
GPIO2_11P: JP2.25 U1.94(B35_L16_P)
GPIO2_12N: JP2.28 U1.93(B35_L18_N)
GPIO2_12P: JP2.27 U1.92(B35_L18_P)
GPIO2_13N: JP2.32 U1.88(B35_L10_N)
GPIO2_13P: JP2.31 U1.87(B35_L10_P)
GPIO2_14N: JP2.34 U1.83(B35_L8_N)
GPIO2_14P: JP2.33 U1.82(B35_L8_P)
GPIO2_15N: JP2.36 U1.80(B35_L9_N)
GPIO2_15P: JP2.35 U1.79(B35_L9_P)
GPIO2_16N: JP2.38 U1.78(B35_L7_N)
GPIO2_16P: JP2.37 U1.77(B35_L7_P)
GPIO2_17N: JP2.40 U1.75(B35_L13_N_MRCC)
GPIO2_17P: JP2.39 U1.74(B35_L13_P_MRCC)
GPIO3_0N: JP3.2 U1.73(B35_L17_N)
GPIO3_0P: JP3.1 U1.72(B35_L17_P)
GPIO3_1N: JP3.4 U1.70(B35_L24_N)
GPIO3_1P: JP3.3 U1.69(B35_L24_P)
GPIO3_2N: JP3.6 U1.65(B35_L22_N)
GPIO3_2P: JP3.5 U1.64(B35_L22_P)
GPIO3_3N: JP3.8 U1.63(B35_L21_N)
GPIO3_3P: JP3.7 U1.62(B35_L21_P)
GPIO3_4N: JP3.10 U1.60(B34_L13_N_MRCC)
GPIO3_4P: JP3.9 U1.59(B34_L13_P_MRCC)
GPIO3_5N: JP3.14 U1.58(B34_L14_N_SRCC)
GPIO3_5P: JP3.13 U1.57(B34_L14_P_SRCC)
GPIO3_6N: JP3.16 U1.55(B34_L24_N)
GPIO3_6P: JP3.15 U1.54(B34_L24_P)
GPIO3_7N: JP3.18 U1.53(B34_L19_N)
GPIO3_7P: JP3.17 U1.52(B34_L19_P)
GPIO3_8N: JP3.20 U1.50(B34_L23_N)
GPIO3_8P: JP3.19 U1.49(B34_L23_P)
GPIO3_9N: JP3.22 U1.48(B34_L20_N)
GPIO3_9P: JP3.21 U1.47(B34_L20_P)
MODE0: SW1.1(A1) U1.119(MODE0)
MODE1: SW1.2(A2) U1.120(MODE1)
PG_1V8: R50.1 R62.1 U18.1(PG)
PG_3V3: R49.1 R51.1 U19.1(PG)
PG_SYS: R60.1 R63.2 U1.158(PG_SYS) U23.3(EN) U24.3(EN)
PHY_LED0: J5.13(LED_Y-) U1.127(PHY_LED0)
PHY_LED1: R25.2 U1.126(PHY_LED1)
PL_KEY: R61.1 U1.68(B35_L12_N_MRCC)
PS_KEY: R39.1 U1.145(MIO9)
RESET_N: R38.1 U1.157(RESET_N)
SD_CLK: U1.139(SD_CLK) U4.9(CLKA)
SD_CMD: U1.140(SD_CMD) U4.4(CMDA)
SD_DATA0: U1.141(SD_DATA0) U4.6(DATA0A)
SD_DATA1: U1.142(SD_DATA1) U4.7(DATA1A)
SD_DATA2: U1.143(SD_DATA2) U4.1(DATA2A)
SD_DATA3: U1.144(SD_DATA3) U4.3(DATA3A)
UART_RX: R3.2 U1.150(UART_RX)
UART_TX: R2.2 U1.151(UART_TX)
USB2UART_DM: R68.2 U2.2(UD-)
USB2UART_DP: R4.2 U2.1(UD+)
USB_OTG_CPEN: U1.121(USB_OTG_CPE) U6.4(\\E\N)
USB_OTG_ID: R14.2 U1.125(USB_OTG_ID)
USB_OTG_N: J3.2(DM) U1.123(USB_OTG_N)
USB_OTG_P: J3.3(DP) U1.122(USB_OTG_P)
USB_VBUS: R13.2 U1.124(USB_VBUS)
VMOD_3V3: J6.4 J6.6 R63.1 U1.152(VREF_JTAG)
VREF_CAN0: C130.1 U29.5(VREF)
VREF_CAN1: C134.1 U31.5(VREF)
N17562195: R60.2 R62.2 U19.8(EN)
N17562222: C110.2 R53.1 R55.2 U19.7(FB)
N17562326: L4.1 U19.3(SW)
N17829800: J2.9(CD) TP1.1
N17839983: R41.2 U18.8(EN)
N17839999: C109.2 R52.1 R54.2 U18.7(FB)
N17840102: L3.1 U18.3(SW)
N17865329: R5.1 R9.2 U4.24(SEL)
N18003880: D1.K R46.1
N18003905: Q4.3(C) R46.2
N18003918: Q4.1(B) R49.2
N18358085: B9.1 C95.1 Y3.1(OE) Y3.4(VDD)
N18360896: C121.1 K3.2 R59.2 R61.2
N18360914: C34.1 K2.2 R36.2 R39.2
N18451169: J6.1 R64.1
N18451171: J6.3 R65.1
N18451173: J6.5 R66.1
N18451183: J6.9 R67.1
N18472316: J1.A5(CC1) R70.2
N18472318: J1.B5(CC2) R69.2
N18472320: J1.A7(DN1) J1.B7(DN2) R68.1
N18472322: J1.A6(DP1) J1.B6(DP2) R4.1
N18472552: R3.1 U2.8(TXD)
N18472554: R2.1 U2.9(RXD)
N18473581: R88.2 U6.3(\\O\C)
N18475580: J5.11(LED_G+) R25.1
N18475582: J5.14(LED_Y+) R26.1
N18475586: C28.1 J5.10(PGND) J5.15(SHIELD1) J5.16(SHIELD2) R35.2
N18475864: C27.1 J5.1(CT)
N18476658: C33.1 K1.2 R37.2 R38.2
N18476804: R40.1 U50.4(Y)
N18477117: R89.2 U50.2(A)
N18477119: R89.1 Y3.3(OUT)
N18477878: R121.1 U29.8(RS)
N18477948: R123.1 U31.8(RS)
N18478106: PH1.1 R143.1
N18478160: PH2.1 R144.1

Pads without a net: J1 A8 B8; J6 7 8; JP3 23 24 25 26 27 28; NOREF#2 1; NOREF#4 1; NOREF#7 1; NOREF#14 1; NOREF#15 1; NOREF#16 1; U2 4 5 6; U4 8 10 12 13 14 15; U23 4; U24 4; U50 1

## Via types
v1: diameter 0.457, hole 0.254, TOP to BOTTOM, 586 vias
v2: diameter 0.61, hole 0.305, TOP to BOTTOM, 19 vias

## Routing (per net, layer and track width the routed paths; a pad name or vN(x,y) marks a point on that pad's centre or on a via; arc(x,y) is an arc through that point)
GND: length 404.7
  TOP w0.305: U18.6 34.35,73.8 v1(34.85,74.29) ; v1(27.56,78.49) 27.44,78.6 U4.11 26.11,78.6 25.36,77.85 v1(24.6,77.85) ; v1(23.88,77.09) 23.85,77.06 U4.2 ; v1(36.83,71.25) 36.46,70.87 R54.1
  TOP w0.381: U19.4 54.15,76.1 53.5,76.75 U19.6 53.5,78.98 54.28,79.76 ; K2.1 v1(70.04,6.79) ; J1.B1A12 v1(4.11,92.63) v1(4.11,91.99) ; 29,75.56 v1(29,76.66) v1(29.54,76.66) ; v1(14.56,97.16) J2.13 v1(14.56,94.06) ; v2(17.91,7.24) 18.29,6.86 C33.2 ; C8.2 C117.1 27.56,75.31 v1(27.43,75.44) ; J2.11 15.46,86.78 v1(15.11,87.12) ; v1(30.31,87.25) J2.10 v1(30.31,84.75) ; C34.2 62,5.64 v1(62,4.6) 62,3.88 C121.2 ; v1(10.03,7.24) 8.83,6.03 K1.1 7.56,6.03 v1(7.24,5.71) ; v1(11.05,92.96) 10.51,93.5 J1.A1B12 ; v1(32.51,77.85) v1(33.19,77.85) 33.58,77.47 C111.1 34.21,77.09 33.7,76.58 U18.4 ; v1(25.59,84.33) 25.56,84.36 J2.6 ; C134.2 v1(75.56,85.59) ; SW1.3 v1(76.96,79.5) ; v1(63.52,75.59) C214.2 U29.2 ; Q4.2 v1(15.94,79.82) ; R121.2 v1(61.48,85.59) ; v1(50.42,74.42) 50.68,74.68 C112.1 ; R9.1 v1(20.86,73.76) ; v1(30.06,93.95) J2.12 29.13,95.6 28.75,95.22 v1(28.75,94.17) ; v2(54.1,79.5) 53.47,80.13 R55.1 ; 56.92,78.61 56.31,78.61 v2(56.05,78.87) ; R14.1 v1(59.68,72) ; SW1.4 v1(75.69,79.5) ; v1(69.11,75.59) C133.2 U31.2 ; K3.1 v1(70.04,2.73)
  TOP w0.508: U1.36 v1(10.03,20.31) ; C103.1 9.42,83.59 v2(9.14,83.31) v2(8.13,83.31) ; U1.6 v1(10.03,58.41) ; U1.111 v1(69.72,53.33) ; 65.66,59.69 65.66,59.68 U1.116 v1(69.84,59.68) ; v2(8.26,84.71) v2(9.14,84.71) 9.3,84.86 C104.1 ; U1.76 v1(59.68,10.28) ; U1.81 v1(69.72,15.23) ; U1.21 v1(10.03,39.36) ; U1.86 v1(69.72,21.58) ; U1.101 v1(69.72,40.63) ; U1.96 v1(69.72,34.28) ; U1.16 v1(10.03,45.71) ; U1.106 v1(69.72,46.98) ; U1.46 v1(21.58,10.28) ; U1.91 v1(69.72,27.93)
  TOP w0.635: 14.99,58.42 14.98,58.41 U1.6 ; 15.11,39.37 15.11,39.36 U1.21 ; 15.11,52.07 15.11,52.06 U1.11 ; 65.41,27.94 65.41,27.93 U1.91 ; 15.11,45.72 15.11,45.71 U1.16 ; 27.94,14.73 27.93,14.73 U1.51 ; U1.56 34.28,14.28 v1(33.78,14.78) ; U1.36 15.11,20.31 15.11,20.32 ; v1(41.4,14.78) 40.63,14.02 U1.61 ; 65.53,53.34 65.54,53.33 U1.111 ; 65.53,21.59 65.54,21.58 U1.86 ; U1.26 15.23,33.01 15.24,33.02 ; U1.96 65.54,34.28 65.53,34.29 ; U1.81 65.4,15.23 ; U1.66 46.98,14.28 v1(46.48,14.78) ; 65.28,40.64 65.28,40.63 U1.101 ; U1.41 15.23,14.6 16,15.37 ; U1.128 v2(55.87,69.98) ; 65.28,46.99 65.28,46.98 U1.106 ; U1.46 21.58,14.33 ; U1.138 v1(43.17,69.72) ; U1.76 59.68,14.33 ; U1.1 v1(12.77,64.76) ; U1.133 v2(49.52,69.85)
  GND02 w0.305: M2.1 75.21,67.21 75.21,65.81 74.3,64.9 ; M2.1 76,66.89 76.96,65.92 76.96,64.77 ; M2.1 77.11,68 ; M2.1 74.89,68 ; M2.1 76,69.11 ; 5.11,68 6.31,66.8 7.37,66.8 ; 5.11,68 5.95,68.83 7.75,68.83 ; 5.11,68 M1.1 ; 78.74,66.04 78.74,66.37 77.11,68 ; 77.11,4 78.57,2.54 79.12,2.54 ; 77.11,4 78.19,5.08 79.25,5.08 ; 77.11,4 M3.1 ; 2.89,68 1.56,66.67 1.02,66.67 ; 2.89,68 M1.1 ; 2.89,68 1.93,68.96 0.76,68.96 ; 5.33,64.64 5.33,65.55 4,66.89 ; 7.24,2.92 6.19,2.92 5.11,4 ; 72.64,66.67 73.56,66.67 74.89,68 ; 0.89,2.79 1.68,2.79 2.89,4 ; M3.1 76,5.11 77.72,6.84 77.72,7.62 ; M3.1 74.89,4 ; M3.1 75.18,4.82 75.18,8 ; M3.1 76,2.89 ; 74.89,4 73.93,4.95 72.26,4.95 ; 74.89,4 73.43,2.54 72.64,2.54 ; 76,2.89 74.68,1.56 74.68,0.89 ; 76,2.89 77.34,1.54 77.34,0.89 ; 4,5.11 5.21,6.32 5.21,7.24 ; 4,5.11 2.92,6.19 2.92,7.62 ; 4,5.11 M4.1 ; 2.89,4 1.81,5.08 0.76,5.08 ; 2.89,4 M4.1 ; 7.62,4.95 6.07,4.95 5.11,4 ; 2.54,0.89 2.54,1.43 4,2.89 ; 77.34,71.37 77.34,70.46 76,69.11 ; 2.92,64.77 2.92,65.81 4,66.89 ; M1.1 4,66.89 ; M1.1 4,69.11 5.08,70.19 5.08,71.25 ; M1.1 3.17,68.82 3.17,71.5 ; 4,2.89 M4.1 ; 4,2.89 5.59,1.3 5.59,0.89 ; 76,69.11 74.68,70.44 74.68,71.63 ; 77.11,68 78.33,69.22 79.25,69.22 ; 72.64,69.34 73.54,69.34 74.89,68 ; 5.11,4 M4.1
  GND02 w0.508: JP3.30 22.22,2.75 ; JP3.30 22.22,0.79 ; JP3.30 21.24,1.77 ; JP3.30 23.2,1.77 ; J3.BO3 55.01,96.62 ; J3.BO3 56.88,95.6 ; J3.BO3 53.14,95.6 ; J3.BO3 55.01,94.58 ; 2.29,87.19 J6.10 ; J6.10 4.17,87.19 ; J6.10 3.23,86.25 ; J6.10 3.23,88.13 ; J1.G2 3.68,94.25 ; J1.G2 2.3,94.25 ; J1.G2 2.99,93.01 ; J1.G2 2.99,95.49 ; 3.23,76.09 J6.2 ; J6.2 3.23,77.97 ; J6.2 4.17,77.03 ; J6.2 2.29,77.03 ; 56.82,90 J3.BO1 ; J3.BO1 58.09,88.51 ; J3.BO1 59.36,90 ; J3.BO1 58.09,91.49 ; 77.25,47.43 JP2.12 ; JP2.12 78.23,48.41 ; JP2.12 79.21,47.43 ; JP2.12 78.23,46.45 ; JP2.30 79.21,24.57 ; JP2.30 78.23,25.55 ; JP2.30 77.25,24.57 ; JP2.30 78.23,23.59 ; JP3.12 45.08,2.75 ; JP3.12 44.1,1.77 ; JP3.12 46.06,1.77 ; JP3.12 45.08,0.79 ; 10.94,98.4 J1.G3 ; J1.G3 11.63,97.31 ; J1.G3 12.32,98.4 ; J1.G4 3.68,98.4 ; J1.G4 2.3,98.4 ; J1.G4 2.99,97.31 ; JP1.30 2.75,47.43 ; JP1.30 1.77,46.45 ; JP1.30 1.77,48.41 ; JP1.30 0.79,47.43 ; 11.63,93.01 J1.G1 ; J1.G1 10.94,94.25 ; J1.G1 12.32,94.25 ; J1.G1 11.63,95.49 ; J3.4 57.82,88 ; J3.4 57.11,87.16 ; J3.4 57.11,88.84 ; J3.BO2 51.93,91.49 ; J3.BO2 50.66,90 ; J3.BO2 53.2,90 ; J3.BO2 51.93,88.51 ; 1.77,23.59 JP1.12 ; JP1.12 1.77,25.55 ; JP1.12 0.79,24.57 ; JP1.12 2.75,24.57
  GND02 w0.762: 32.05,97.77 42.12,97.77 J5.12 48,97.9 51.48,97.9
  BOTTOM w0.381: v1(8.64,91.19) 8.64,91.31 C4.1 ; C5.1 v1(23.24,89.15) ; C3.2 17.72,87.3 C2.1 19.53,86.77 v1(19.56,86.74) ; U6.2 56.13,83.44 v1(56.39,83.19) ; v1(21.08,88.84) C7.1 v1(22.07,89.66) ; v1(48.64,9.53) 48.45,9.72 C213.2 ; v1(73.11,87.93) D14.3 72.26,88.65 v1(72.64,89.03) ; C95.2 33.98,14.58 v1(33.78,14.78) ; v1(66.38,87.93) D13.3 65.53,88.52 v1(65.02,89.03) ; C27.2 v1(46.63,76.33) ; C130.2 v1(67.56,80.02) R123.2 ; v1(49.96,83.23) 51.18,83.23 v1(51.18,82.17) ; v1(51.52,85.98) C128.2 v1(50.57,84.99) ; v1(39.37,13.08) 38.86,12.57 Y3.2 v1(38.14,14.31) 38.1,14.35 ; v1(13.84,92.46) 13.36,91.97 C1.1 v1(12.64,92.9) ; v1(5.33,95.76) 5.84,95.25 R69.1 ; C122.1 12.57,6.48 v1(12.45,6.6) 12.45,6.73 v1(12.06,7.11) U23.2 ; U2.3 v1(8.76,89.53) ; C6.2 23.5,83.06 v1(23.24,83.31) ; C126.2 52.32,5.9 v1(52.13,5.71) ; R70.1 8.64,94.74 v1(9.4,95.5) ; U24.2 45.53,7.58 45.36,7.74 C123.1 44.19,7.74 v1(44.09,7.64) ; U50.3 v1(42.26,12.7)
  BOTTOM w0.508: v2(18.67,7.62) 18.29,7.24 v2(17.91,7.24) 17.81,7.34 C108.2 16.63,7.04 C124.2 ; v1(53.85,6.35) v1(53.34,6.86) 53.34,7.12 C125.2 ; C127.1 v1(62.74,81.43) 63.37,80.8 v1(63.37,80.77) ; C2.1 17.74,86.74 v1(19.56,86.74) v1(19.56,87.5) ; C113.1 60.95,82.54 v1(61.59,83.19) ; R35.1 32.78,79.24 33.41,78.6 v1(33.77,78.6) v1(34.43,78.6) ; C28.2 v1(28.21,79.24) v1(27.57,79.24)
  vias: v1(16,61.77) v1(16,59.23) v1(16,56.69) v1(16,54.15) v1(16,51.61) v1(16,49.07) v1(16,46.53) v1(16,43.99) v1(16,41.45) v1(16,38.91) v1(16,36.37) v1(16,33.83) v1(16,31.29) v1(16,28.75) v1(16,26.21) v1(16,23.67) v1(16,21.13) v1(18.54,61.77) v1(18.54,59.23) v1(18.54,56.69) v1(18.54,54.15) v1(18.54,51.61) v1(18.54,49.07) v1(18.54,46.53) v1(18.54,43.99) v1(18.54,41.45) v1(18.54,38.91) v1(18.54,36.37) v1(18.54,33.83) v1(18.54,31.29) v1(18.54,28.75) v1(18.54,26.21) v1(18.54,23.67) v1(18.54,21.13) v1(18.54,16.05) v1(18.54,14.78) v1(21.08,61.77) v1(21.08,59.23) v1(21.08,56.69) v1(21.08,54.15) v1(21.08,51.61) v1(21.08,49.07) v1(21.08,46.53) v1(21.08,43.99) v1(21.08,41.45) v1(21.08,38.91) v1(21.08,36.37) v1(21.08,33.83) v1(21.08,31.29) v1(21.08,28.75) v1(21.08,26.21) v1(21.08,23.67) v1(21.08,18.59) v1(21.08,16.05) v1(21.08,14.78) v1(23.62,61.77) v1(23.62,59.23) v1(23.62,56.69) v1(23.62,54.15) v1(23.62,51.61) v1(23.62,49.07) v1(23.62,46.53) v1(23.62,43.99) v1(23.62,41.45) v1(23.62,38.91) v1(23.62,36.37) v1(23.62,33.83) v1(23.62,31.29) v1(23.62,28.75) v1(23.62,26.21) v1(23.62,21.13) v1(23.62,18.59) v1(23.62,16.05) v1(23.62,14.78) v1(23.88,78.61) v1(25.4,78.61) v1(25.4,77.09) v1(26.16,61.77) v1(26.16,59.23) v1(26.16,56.69) v1(26.16,54.15) v1(26.16,51.61) v1(26.16,49.07) v1(26.16,46.53) v1(26.16,43.99) v1(26.16,41.45) v1(26.16,38.91) v1(26.16,36.37) v1(26.16,33.83) v1(26.16,31.29) v1(26.16,28.75) v1(26.16,23.67) v1(26.16,21.13) v1(26.16,18.59) v1(26.16,16.05) v1(26.16,14.78) v1(28.7,61.77) v1(28.7,59.23) v1(28.7,56.69) v1(28.7,54.15) v1(28.7,51.61) v1(28.7,49.07) v1(28.7,46.53) v1(28.7,43.99) v1(28.7,41.45) v1(28.7,38.91) v1(28.7,36.37) v1(28.7,33.83) v1(28.7,31.29) v1(28.7,26.21) v1(28.7,23.67) v1(28.7,21.13) v1(28.7,18.59) v1(28.7,16.05) v1(28.7,14.78) v1(31.24,61.77) v1(31.24,59.23) v1(31.24,56.69) v1(31.24,54.15) v1(31.24,51.61) v1(31.24,49.07) v1(31.24,46.53) v1(31.24,43.99) v1(31.24,41.45) v1(31.24,38.91) v1(31.24,36.37) v1(31.24,33.83) v1(31.24,31.29) v1(31.24,28.75) v1(31.24,26.21) v1(31.24,23.67) v1(31.24,21.13) v1(31.24,18.59) v1(31.24,16.05) v1(31.24,14.78) v1(33.78,61.77) v1(33.78,59.23) v1(33.78,56.69) v1(33.78,54.15) v1(33.78,51.61) v1(33.78,49.07) v1(33.78,46.53) v1(33.78,43.99) v1(33.78,41.45) v1(33.78,38.91) v1(33.78,36.37) v1(33.78,33.83) v1(33.78,31.29) v1(33.78,28.75) v1(33.78,26.21) v1(33.78,23.67) v1(33.78,21.13) v1(33.78,18.59) v1(33.78,16.05) v1(36.32,61.77) v1(36.32,59.23) v1(36.32,56.69) v1(36.32,54.15) v1(36.32,51.61) v1(36.32,49.07) v1(36.32,46.53) v1(36.32,43.99) v1(36.32,41.45) v1(36.32,38.91) v1(36.32,36.37) v1(36.32,33.83) v1(36.32,31.29) v1(36.32,28.75) v1(36.32,26.21) v1(36.32,23.67) v1(36.32,21.13) v1(36.32,18.59) v1(36.32,16.05) v1(36.32,14.78) v1(38.86,61.77) v1(38.86,59.23) v1(38.86,56.69) v1(38.86,54.15) v1(38.86,51.61) v1(38.86,49.07) v1(38.86,46.53) v1(38.86,43.99) v1(38.86,41.45) v1(38.86,38.91) v1(38.86,36.37) v1(38.86,33.83) v1(38.86,31.29) v1(38.86,28.75) v1(38.86,26.21) v1(38.86,23.67) v1(38.86,21.13) v1(38.86,18.59) v1(38.86,16.05) v1(38.86,14.78) v1(41.4,61.77) v1(41.4,59.23) v1(41.4,56.69) v1(41.4,54.15) v1(41.4,51.61) v1(41.4,49.07) v1(41.4,46.53) v1(41.4,43.99) v1(41.4,41.45) v1(41.4,38.91) v1(41.4,36.37) v1(41.4,33.83) v1(41.4,31.29) v1(41.4,28.75) v1(41.4,26.21) v1(41.4,23.67) v1(41.4,21.13) v1(41.4,18.59) v1(41.4,16.05) v1(43.94,61.77) v1(43.94,59.23) v1(43.94,56.69) v1(43.94,54.15) v1(43.94,51.61) v1(43.94,49.07) v1(43.94,46.53) v1(43.94,43.99) v1(43.94,41.45) v1(43.94,38.91) v1(43.94,36.37) v1(43.94,33.83) v1(43.94,31.29) v1(43.94,28.75) v1(43.94,26.21) v1(43.94,23.67) v1(43.94,21.13) v1(43.94,18.59) v1(43.94,16.05) v1(43.94,14.78) v1(46.48,61.77) v1(46.48,59.23) v1(46.48,56.69) v1(46.48,54.15) v1(46.48,51.61) v1(46.48,49.07) v1(46.48,46.53) v1(46.48,43.99) v1(46.48,41.45) v1(46.48,38.91) v1(46.48,36.37) v1(46.48,33.83) v1(46.48,31.29) v1(46.48,28.75) v1(46.48,26.21) v1(46.48,23.67) v1(46.48,21.13) v1(46.48,18.59) v1(46.48,16.05) v1(49.02,61.77) v1(49.02,59.23) v1(49.02,56.69) v1(49.02,54.15) v1(49.02,51.61) v1(49.02,49.07) v1(49.02,46.53) v1(49.02,43.99) v1(49.02,41.45) v1(49.02,38.91) v1(49.02,36.37) v1(49.02,33.83) v1(49.02,31.29) v1(49.02,28.75) v1(49.02,26.21) v1(49.02,23.67) v1(49.02,21.13) v1(49.02,18.59) v1(49.02,16.05) v1(49.02,14.78) v1(51.56,61.77) v1(51.56,59.23) v1(51.56,56.69) v1(51.56,54.15) v1(51.56,51.61) v1(51.56,49.07) v1(51.56,46.53) v1(51.56,43.99) v1(51.56,41.45) v1(51.56,38.91) v1(51.56,36.37) v1(51.56,33.83) v1(51.56,31.29) v1(51.56,28.75) v1(51.56,26.21) v1(51.56,23.67) v1(51.56,21.13) v1(51.56,18.59) v1(51.56,16.05) v1(51.56,14.78) v1(54.1,61.77) v1(54.1,59.23) v1(54.1,56.69) v1(54.1,54.15) v1(54.1,51.61) v1(54.1,49.07) v1(54.1,46.53) v1(54.1,43.99) v1(54.1,41.45) v1(54.1,38.91) v1(54.1,36.37) v1(54.1,33.83) v1(54.1,31.29) v1(54.1,28.75) v1(54.1,26.21) v1(54.1,23.67) v1(54.1,21.13) v1(54.1,18.59) v1(54.1,16.05) v1(54.1,14.78) v1(56.64,61.77) v1(56.64,59.23) v1(56.64,56.69) v1(56.64,54.15) v1(56.64,51.61) v1(56.64,49.07) v1(56.64,46.53) v1(56.64,43.99) v1(56.64,41.45) v1(56.64,38.91) v1(56.64,36.37) v1(56.64,33.83) v1(56.64,31.29) v1(56.64,28.75) v1(56.64,26.21) v1(56.64,23.67) v1(56.64,21.13) v1(56.64,18.59) v1(56.64,16.05) v1(56.64,14.78) v1(59.18,61.77) v1(59.18,59.23) v1(59.18,56.69) v1(59.18,54.15) v1(59.18,51.61) v1(59.18,49.07) v1(59.18,46.53) v1(59.18,43.99) v1(59.18,41.45) v1(59.18,38.91) v1(59.18,36.37) v1(59.18,33.83) v1(59.18,31.29) v1(59.18,28.75) v1(59.18,26.21) v1(59.18,23.67) v1(59.18,21.13) v1(59.18,18.59) v1(59.18,16.05) v1(59.18,14.78) v1(61.72,61.77) v1(61.72,59.23) v1(61.72,56.69) v1(61.72,54.15) v1(61.72,51.61) v1(61.72,49.07) v1(61.72,46.53) v1(61.72,43.99) v1(61.72,41.45) v1(61.72,38.91) v1(61.72,36.37) v1(61.72,33.83) v1(61.72,31.29) v1(61.72,28.75) v1(61.72,26.21) v1(61.72,23.67) v1(61.72,21.13) v1(61.72,18.59) v1(61.72,16.05) v1(61.72,14.78) v1(64.26,61.77) v1(64.26,59.23) v1(64.26,56.69) v1(64.26,54.15) v1(64.26,51.61) v1(64.26,49.07) v1(64.26,46.53) v1(64.26,43.99) v1(64.26,41.45) v1(64.26,38.91) v1(64.26,36.37) v1(64.26,33.83) v1(64.26,31.29) v1(64.26,28.75) v1(64.26,26.21) v1(64.26,23.67) v1(64.26,21.13) v1(64.26,18.59) v1(64.26,16.05) v1(64.26,14.78) v2(54.99,79.5)
VCC_1V8: length 11
  TOP w0.305: U4.5 25.35,74.47 26.15,73.67 C8.1 ; R52.2 C109.1
  TOP w0.381: 32.38,72.52 33.02,71.88 R52.2 ; R5.2 23.65,73.76 24.89,72.52 27.3,72.52
VCC_3V3: length 41.4
  TOP w0.254: U4.21 v1(21.84,78.1)
  TOP w0.305: R51.2 50.67,73.79 v1(50.42,73.53) ; U4.17 v1(23.85,80.62)
  TOP w0.381: R12.2 v1(27.76,81.71) ; R11.2 v1(26.66,81.71) ; R6.2 v1(19.43,81.58) ; R7.2 v1(20.78,81.58) ; R53.2 C110.1 51.25,80.72 v1(51.82,81.28) ; R37.1 19.28,6.7 v1(19.56,6.99) ; 70.99,77.26 70.99,76.33 70.72,76.06 C133.1 v1(71.48,75.59) ; R10.2 v1(24.46,81.71) ; R36.1 v1(60.86,5.08) ; J2.4 v1(23.36,86.58) v1(22.51,86.58) ; U29.3 65.53,75.85 C214.1 v1(65.26,74.82) ; R8.2 v1(21.88,81.58)
  VCC03 w0.508: JP3.29 23.2,4.31 ; JP3.29 21.24,4.31 ; JP3.29 22.22,5.29 ; JP3.29 22.22,3.33 ; 75.69,23.59 JP2.29 ; JP2.29 74.71,24.57 ; JP2.29 75.69,25.55 ; JP2.29 76.67,24.57 ; JP1.29 5.29,47.43 ; JP1.29 4.31,48.41 ; JP1.29 3.33,47.43 ; JP1.29 4.31,46.45
  BOTTOM w0.381: R26.2 v1(31.36,90.03) ; R88.1 v1(57.15,85.6) ; C6.1 23.5,80.97 v1(23.85,80.62) ; C3.1 15.88,87.88 15.22,88.54 U2.10 ; C7.2 22.07,87.02 v1(22.51,86.58) ; C5.2 23.24,86.7 v1(23.36,86.58) ; B9.2 v1(32.13,12.71) ; U2.7 15.36,90.03 v1(15.62,90.3)
  BOTTOM w0.508: C3.1 16.14,86.97 C2.2 16.34,85.64 v1(16.64,85.34) v1(17.27,85.34)
  vias: v1(58.8,78.87) v1(58.8,78.11) v1(58.8,77.34)
VCC_5V: length 9.9
  TOP w0.305: R41.1 R50.2 35.85,74.18 35,75.03 U18.2
  TOP w0.381: U18.2 35,76.53 35.21,76.74 C111.2 35.94,77.47 v1(35.99,77.42) 36.2,77.22 v1(36.2,76.58)
  TOP w0.762: U1.159 16.5,67.23 ; U1.160 15.23,67.23
  vias: v1(66.93,68.97) v1(66.93,68.39) v1(67.56,68.96) v1(67.56,68.38) v2(10.41,70.61) v2(11.05,69.85) v2(11.56,70.61) v2(12.7,83.44) v2(12.83,84.2) v2(13.97,84.2) v2(48.94,75.06) v2(49.91,75.06)
VCC_USB2UART_5V: length 11.3
  TOP w0.381: J1.B4A9 4.91,94.23 6.05,95.38 8.52,95.38 9.71,94.19 J1.A4B9 v1(9.71,92.65) v1(10.36,92.65)
  BOTTOM w0.381: C1.2 11.11,91.82 C4.2 10.15,92.32 10.36,92.53 v1(10.36,92.65) v1(9.71,92.65)
VCC_USB5V: length 19.7
  TOP w0.381: v1(54.1,84.07) 55.63,82.55 59.82,82.55 60.96,81.41 60.96,72.9 60.95,72.89 R13.1
  BOTTOM w0.508: J3.1 52.91,86.44
VCCIO34:
  vias: v1(12.77,26.66) v1(13.34,26.67)
VCCIO35: length 21.2
  TOP w0.381: U1.71 53.33,10.29 v1(54.23,9.4) ; R59.1 v1(60.86,4.42)
  BOTTOM w0.381: 50.96,6.07 51.44,5.59 51.44,3.81 52.2,3.05 59.49,3.05 v1(60.86,4.42) ; U50.5 C213.1 47,9.41 48.77,7.64 48.77,7.29
CAN0_RX: length 42.1
  TOP w0.127: v1(64.26,71.5) 66.8,74.04 U29.4 ; U1.146 v1(33.01,66.93)
  BOTTOM w0.127: v1(33.01,66.93) 33.65,66.29 58.93,66.29 64.14,71.5 v1(64.26,71.5)
CAN0_TX: length 43.1
  TOP w0.127: U29.1 62.99,72.26 63.63,71.63 v1(63.63,70.23) ; U1.147 v1(31.74,66.93)
  BOTTOM w0.127: v1(63.63,70.23) 59.18,65.79 32.89,65.79 v1(31.74,66.93)
CAN0H: length 12.5
  TOP w0.305: U29.7 64.26,85.47 PH1.2 64.52,91.27 J12.1
  BOTTOM w0.305: D13.1 64.58,91.2 J12.1
CAN0L: length 14.2
  TOP w0.305: U29.6 65.53,84.58 65.79,84.84 65.79,90.99 J12.2
  BOTTOM w0.305: J12.2 66.48,91.69 D13.2 67.07,89.79 R143.2
CAN1_RX: length 52.4
  TOP w0.127: U1.149 v1(29.2,66.93) ; v1(64.9,69.98) 69.47,74.55 71.63,74.55 72.26,75.18 U31.4
  BOTTOM w0.127: v1(64.9,69.98) 64.9,69.22 60.45,64.77 31.36,64.77 v1(29.2,66.93)
CAN1_TX: length 47.1
  TOP w0.127: U1.148 v1(30.47,66.93) ; U31.1 68.45,74.42 v1(64.9,70.87)
  BOTTOM w0.127: v1(64.9,70.87) 64.26,70.23 64.26,69.85 59.69,65.28 32.13,65.28 v1(30.47,66.93)
CAN1H: length 12.1
  TOP w0.305: U31.7 69.72,85.47 PH2.2 69.98,91.37 J12.3
  BOTTOM w0.305: J12.3 71.31,92.09 D14.1
CAN1L: length 15.5
  TOP w0.305: J12.4 71.25,88.83 71.25,84.58 70.99,84.33 70.99,83.01
  BOTTOM w0.305: R144.2 73.8,89.79 D14.2 73.21,90.8 J12.4
CON_SD_CLK: length 7.4
  TOP w0.127: J2.5 R10.1 23.24,82.15 23.24,81.79 22.35,80.9 22.35,79.25 22.5,79.1 U4.19
CON_SD_CMD: length 8.1
  TOP w0.127: J2.3 22.26,84.24 21.88,83.86 R8.1 21.38,82.75 21.38,79.2 21.98,78.6 U4.20
CON_SD_DATA0: length 8
  TOP w0.127: U4.18 23.35,80.88 23.62,81.15 25.02,81.15 25.78,81.92 25.78,82.8 26.34,83.37 R11.1 J2.7
CON_SD_DATA1: length 8.1
  TOP w0.127: U4.16 24.35,80.39 24.48,80.52 26.29,80.52 27.18,81.41 27.18,82.79 R12.1 J2.8
CON_SD_DATA2: length 10.7
  TOP w0.127: J2.1 20.06,84.32 19.43,83.69 R6.1 19.94,82.73 19.94,78.49 21.32,77.1 U4.23
CON_SD_DATA3: length 9.9
  TOP w0.127: J2.2 21.16,84.15 20.78,83.77 R7.1 20.19,82.65 20.19,78.87 21.46,77.6 U4.22
ETH_MDI0_N: length 29
  TOP w0.104: U1.136 45.71,69.35 45.61,69.45 45.34,69.45 45.24,69.56 45.24,70.84 37.91,78.17 37.91,78.6 v1(38.02,78.71)
  BOTTOM w0.104: v1(38.02,78.71) 37.88,78.85 37.88,80.11 37.98,80.2 37.98,81.67 39.19,82.88 39.19,84.53 39.82,85.16 43.12,85.16 43.88,84.4 43.88,83.13 44.39,82.62 44.39,81.41 J5.3
ETH_MDI0_P: length 29
  TOP w0.104: U1.137 44.44,69.35 44.55,69.45 44.82,69.45 44.92,69.56 44.92,70.71 37.59,78.04 37.59,78.55 v1(37.43,78.71)
  BOTTOM w0.104: J5.2 44.82,83.11 44.36,83.11 44.2,83.26 44.2,84.53 43.25,85.48 39.69,85.48 38.87,84.66 38.87,83.01 37.66,81.8 37.66,80.33 37.57,80.24 37.57,78.85 v1(37.43,78.71)
ETH_MDI1_N: length 23.8
  TOP w0.104: J5.7 39.55,80.57 40.31,80.57 40.56,80.82 40.56,82 40.33,82.23 38.42,82.23 37.79,81.6 37.79,80.26 47.78,70.27 47.78,69.56 47.88,69.45 48.15,69.45 48.25,69.35 U1.134
ETH_MDI1_P: length 23.9
  TOP w0.104: U1.135 46.98,69.35 47.09,69.45 47.36,69.45 47.46,69.56 47.46,70.14 37.47,80.13 37.47,81.74 38.29,82.55 41.72,82.55 J5.4
ETH_MDI2_N: length 23.2
  TOP w0.104: v1(41.96,78.71) 41.82,78.58 41.82,77.94 47.94,71.82 50.1,71.82 51.59,70.33 51.59,69.56 51.69,69.45 51.96,69.45 52.06,69.35 U1.131
  BOTTOM w0.104: v1(41.96,78.71) 41.82,78.85 41.82,79.16 43.06,80.4 43.06,81.86 42.13,82.79 41.14,82.79 J5.6
ETH_MDI2_P: length 23.1
  TOP w0.104: v1(41.37,78.71) 41.5,78.58 41.5,77.81 47.81,71.5 49.97,71.5 51.27,70.2 51.27,69.56 51.17,69.45 50.9,69.45 50.79,69.35 U1.132
  BOTTOM w0.104: v1(41.37,78.71) 41.5,78.85 41.5,79.29 42.74,80.53 42.74,81.73 42,82.48 41.21,82.48 40.94,82.22 40.94,81.72 J5.5
ETH_MDI3_N: length 34.6
  TOP w0.104: J5.9 36.39,81.19 36.39,84.34 37.21,85.16 43.38,85.16 44.14,84.4 44.14,82.68 43.06,81.6 43.06,78.35 48.7,72.71 51.5,72.71 54.13,70.08 54.13,69.56 54.23,69.45 54.5,69.45 54.6,69.35 U1.129
ETH_MDI3_P: length 34.5
  TOP w0.104: J5.8 37.39,83.3 37.39,82.32 37.28,82.22 36.81,82.22 36.71,82.32 36.71,84.21 37.34,84.84 43.24,84.84 43.82,84.27 43.82,82.81 42.74,81.73 42.74,78.22 48.57,72.39 51.37,72.39 53.81,69.95 53.81,69.56 53.71,69.45 53.44,69.45 53.33,69.35 U1.130
FPGA_GCLK1: length 2.2
  TOP w0.254: v1(48.64,10.41) 48.25,10.8 U1.67
  BOTTOM w0.381: v1(48.64,10.41) 48.01,11.05 R40.2
FPGA_TCK: length 14.2
  TOP w0.127: U1.155 21.58,69.22 14.61,76.2 R64.2
FPGA_TDI: length 19.5
  TOP w0.127: R67.2 11.04,81.29 21.84,70.48 23.11,70.48 24.12,69.47 U1.153
FPGA_TDO: length 16.7
  TOP w0.127: U1.154 22.85,69.35 22.23,69.98 21.59,69.98 12.57,78.99 R65.2
FPGA_TMS: length 12.4
  TOP w0.127: U1.156 20.31,69.73 16.13,73.91 11.55,73.91 R66.2
GPIO1_0N: length 18.9
  TOP w0.104: U1.43 17.77,10.65 17.67,10.55 17.4,10.55 17.3,10.44 17.3,10.17 17.01,9.88 3.39,9.88 2.75,10.51 2.75,11.77 2.65,11.87 JP1.2
GPIO1_0P: length 18.8
  TOP w0.104: JP1.1 3.73,12.45 3.3,12.45 3.07,12.21 3.07,10.64 3.52,10.19 16.88,10.19 16.98,10.3 16.98,10.44 16.88,10.55 16.61,10.55 16.5,10.65 U1.42
GPIO1_1N: length 25.7
  TOP w0.104: U1.45 20.31,10.65 20.21,10.55 19.94,10.55 19.84,10.44 19.84,9.74 19.05,8.95 4.34,8.95 v1(4.19,8.81)
  BOTTOM w0.104: v1(4.19,8.81) 4.11,8.89 3.49,8.89 2.88,9.5 2.88,14.31 2.78,14.41 JP1.4
GPIO1_1P: length 25.7
  TOP w0.104: v1(4.19,9.42) 4.34,9.27 18.92,9.27 19.52,9.87 19.52,10.44 19.42,10.55 19.15,10.55 19.04,10.65 U1.44
  BOTTOM w0.104: JP1.3 4.31,14.87 4.19,14.99 3.43,14.99 3.2,14.76 3.2,9.63 3.56,9.27 4.04,9.27 v1(4.19,9.42)
GPIO1_2N: length 11.3
  TOP w0.104: U1.40 10.65,15.23 10.55,15.34 10.55,15.61 10.44,15.71 9.23,15.71 9.04,15.52 3.29,15.52 2.88,15.93 2.88,16.85 2.78,16.95 JP1.6
GPIO1_2P: length 11.2
  TOP w0.104: JP1.5 3.93,17.33 3.43,17.33 3.2,17.1 3.2,16.07 3.43,15.84 8.91,15.84 9.1,16.03 10.44,16.03 10.55,16.13 10.55,16.4 10.65,16.5 U1.39
GPIO1_3N: length 11.3
  TOP w0.104: JP1.8 2.78,19.49 2.88,19.39 2.88,18.47 3.29,18.06 6.63,18.06 6.82,18.25 10.44,18.25 10.55,18.15 10.55,17.88 10.65,17.77 U1.38
GPIO1_3P: length 11.2
  TOP w0.104: JP1.7 3.93,19.87 3.43,19.87 3.2,19.64 3.2,18.61 3.43,18.38 6.5,18.38 6.69,18.57 10.44,18.57 10.55,18.67 10.55,18.94 10.65,19.04 U1.37
GPIO1_4N: length 11.8
  TOP w0.104: U1.35 10.65,21.58 10.55,21.69 10.55,21.96 10.44,22.06 9.49,22.06 8.03,20.6 3.29,20.6 2.88,21.01 2.88,21.93 2.78,22.03 JP1.10
GPIO1_4P: length 11.8
  TOP w0.104: U1.34 10.65,22.85 10.55,22.75 10.55,22.48 10.44,22.38 9.36,22.38 7.9,20.92 3.43,20.92 3.2,21.15 3.2,22.18 3.43,22.41 3.93,22.41 JP1.9
GPIO1_5N: length 11.7
  TOP w0.104: JP1.14 2.78,27.11 2.88,27.01 2.88,26.09 3.29,25.68 5.87,25.68 6.95,24.6 10.44,24.6 10.55,24.5 10.55,24.23 10.65,24.12 U1.33
GPIO1_5P: length 11.6
  TOP w0.104: U1.32 10.65,25.39 10.55,25.29 10.55,25.02 10.44,24.92 7.09,24.92 6.01,26 3.43,26 3.2,26.23 3.2,27.26 3.43,27.49 3.93,27.49 JP1.13
GPIO1_6N: length 11.3
  TOP w0.104: JP1.16 2.78,29.65 2.88,29.55 2.88,28.63 3.29,28.22 5.84,28.22 6.03,28.41 10.44,28.41 10.55,28.31 10.55,28.04 10.65,27.93 U1.30
GPIO1_6P: length 11.2
  TOP w0.104: U1.29 10.65,29.2 10.55,29.1 10.55,28.83 10.44,28.73 5.9,28.73 5.7,28.54 3.43,28.54 3.2,28.77 3.2,29.8 3.43,30.03 3.93,30.03 JP1.15
GPIO1_7N: length 11.3
  TOP w0.104: JP1.18 2.78,32.19 2.88,32.09 2.88,31.17 3.29,30.76 5.84,30.76 6.03,30.95 10.44,30.95 10.55,30.85 10.55,30.58 10.65,30.47 U1.28
GPIO1_7P: length 11.2
  TOP w0.104: U1.27 10.65,31.74 10.55,31.64 10.55,31.37 10.44,31.27 5.9,31.27 5.7,31.08 3.43,31.08 3.2,31.31 3.2,32.34 3.43,32.57 3.93,32.57 JP1.17
GPIO1_8N: length 11.8
  TOP w0.104: U1.25 10.65,34.28 10.55,34.39 10.55,34.66 10.44,34.76 9.23,34.76 7.77,33.3 3.29,33.3 2.88,33.71 2.88,34.63 2.78,34.73 JP1.20
GPIO1_8P: length 11.8
  TOP w0.104: JP1.19 3.93,35.11 3.43,35.11 3.2,34.88 3.2,33.85 3.43,33.62 7.64,33.62 9.1,35.08 10.44,35.08 10.55,35.18 10.55,35.45 10.65,35.55 U1.24
GPIO1_9N: length 15.2
  TOP w0.104: U1.20 10.65,40.63 10.55,40.74 10.55,41.01 10.44,41.11 9.62,41.11 8.26,39.75 6.76,39.75 v1(6.6,39.59)
  BOTTOM w0.104: v1(6.6,39.59) 6.51,39.69 6.1,39.69 5.97,39.56 5.97,36.58 5.23,35.84 3.29,35.84 2.88,36.25 2.88,37.17 2.78,37.27 JP1.22
GPIO1_9P: length 15.2
  TOP w0.104: v1(6.6,40.22) 6.75,40.07 8.12,40.07 9.48,41.43 10.44,41.43 10.55,41.53 10.55,41.8 10.65,41.9 U1.19
  BOTTOM w0.104: v1(6.6,40.22) 6.39,40.01 5.97,40.01 5.65,39.69 5.65,36.71 5.1,36.16 3.43,36.16 3.2,36.39 3.2,37.42 3.43,37.65 3.93,37.65 JP1.21
GPIO1_10N: length 11.7
  TOP w0.104: U1.23 10.65,36.82 10.55,36.93 10.55,37.2 10.44,37.3 9.24,37.3 8.16,38.38 3.29,38.38 2.88,38.79 2.88,39.71 2.78,39.81 JP1.24
GPIO1_10P: length 11.6
  TOP w0.104: U1.22 10.65,38.09 10.55,37.99 10.55,37.72 10.44,37.62 9.37,37.62 8.29,38.7 3.43,38.7 3.2,38.93 3.2,39.96 3.43,40.19 3.93,40.19 JP1.23
GPIO1_11N: length 12.3
  TOP w0.104: JP1.26 2.78,42.35 2.88,42.25 2.88,41.33 3.29,40.92 6.5,40.92 9.23,43.65 10.44,43.65 10.55,43.55 10.55,43.28 10.65,43.17 U1.18
GPIO1_11P: length 12.3
  TOP w0.104: U1.17 10.65,44.44 10.55,44.34 10.55,44.07 10.44,43.97 9.1,43.97 6.37,41.24 3.43,41.24 3.2,41.47 3.2,42.5 3.43,42.73 3.93,42.73 JP1.25
GPIO1_12N: length 12.9
  TOP w0.104: U1.15 10.65,46.98 10.55,47.09 10.55,47.36 10.44,47.46 9.74,47.46 5.74,43.46 3.29,43.46 2.88,43.87 2.88,44.79 2.78,44.89 JP1.28
GPIO1_12P: length 12.8
  TOP w0.104: JP1.27 3.93,45.27 3.43,45.27 3.2,45.04 3.2,44.01 3.43,43.78 5.61,43.78 9.61,47.78 10.44,47.78 10.55,47.88 10.55,48.15 10.65,48.25 U1.14
GPIO1_13N: length 11.8
  TOP w0.104: JP1.32 2.78,49.97 2.88,49.87 2.88,48.95 3.29,48.54 7.9,48.54 9.36,50 10.44,50 10.55,49.9 10.55,49.63 10.65,49.52 U1.13
GPIO1_13P: length 11.8
  TOP w0.104: JP1.31 3.93,50.35 3.43,50.35 3.2,50.12 3.2,49.09 3.43,48.86 7.77,48.86 9.23,50.32 10.44,50.32 10.55,50.42 10.55,50.69 10.65,50.79 U1.12
GPIO1_14N: length 12.3
  TOP w0.104: JP1.34 2.78,52.51 2.88,52.41 2.88,51.49 3.29,51.08 7.14,51.08 9.87,53.81 10.44,53.81 10.55,53.71 10.55,53.44 10.65,53.33 U1.10
